# Altium PCB EUS1_Outline_5_trial07.PcbDoc (part 1 of 3)
Units mm, origin at the board's own origin, x right, y up, seen from the top; angles counter-clockwise.
Board outline 95.45 x 90.3 mm, 6 copper layers (Top Layer, Routing 1, GND, EPS_VCC, Routing 2, Bottom Layer), stack 2.257 mm thick; 247 components, 187 nets, 935 pads, 315 vias.
Unrouted connection lines stored in the file: 34.
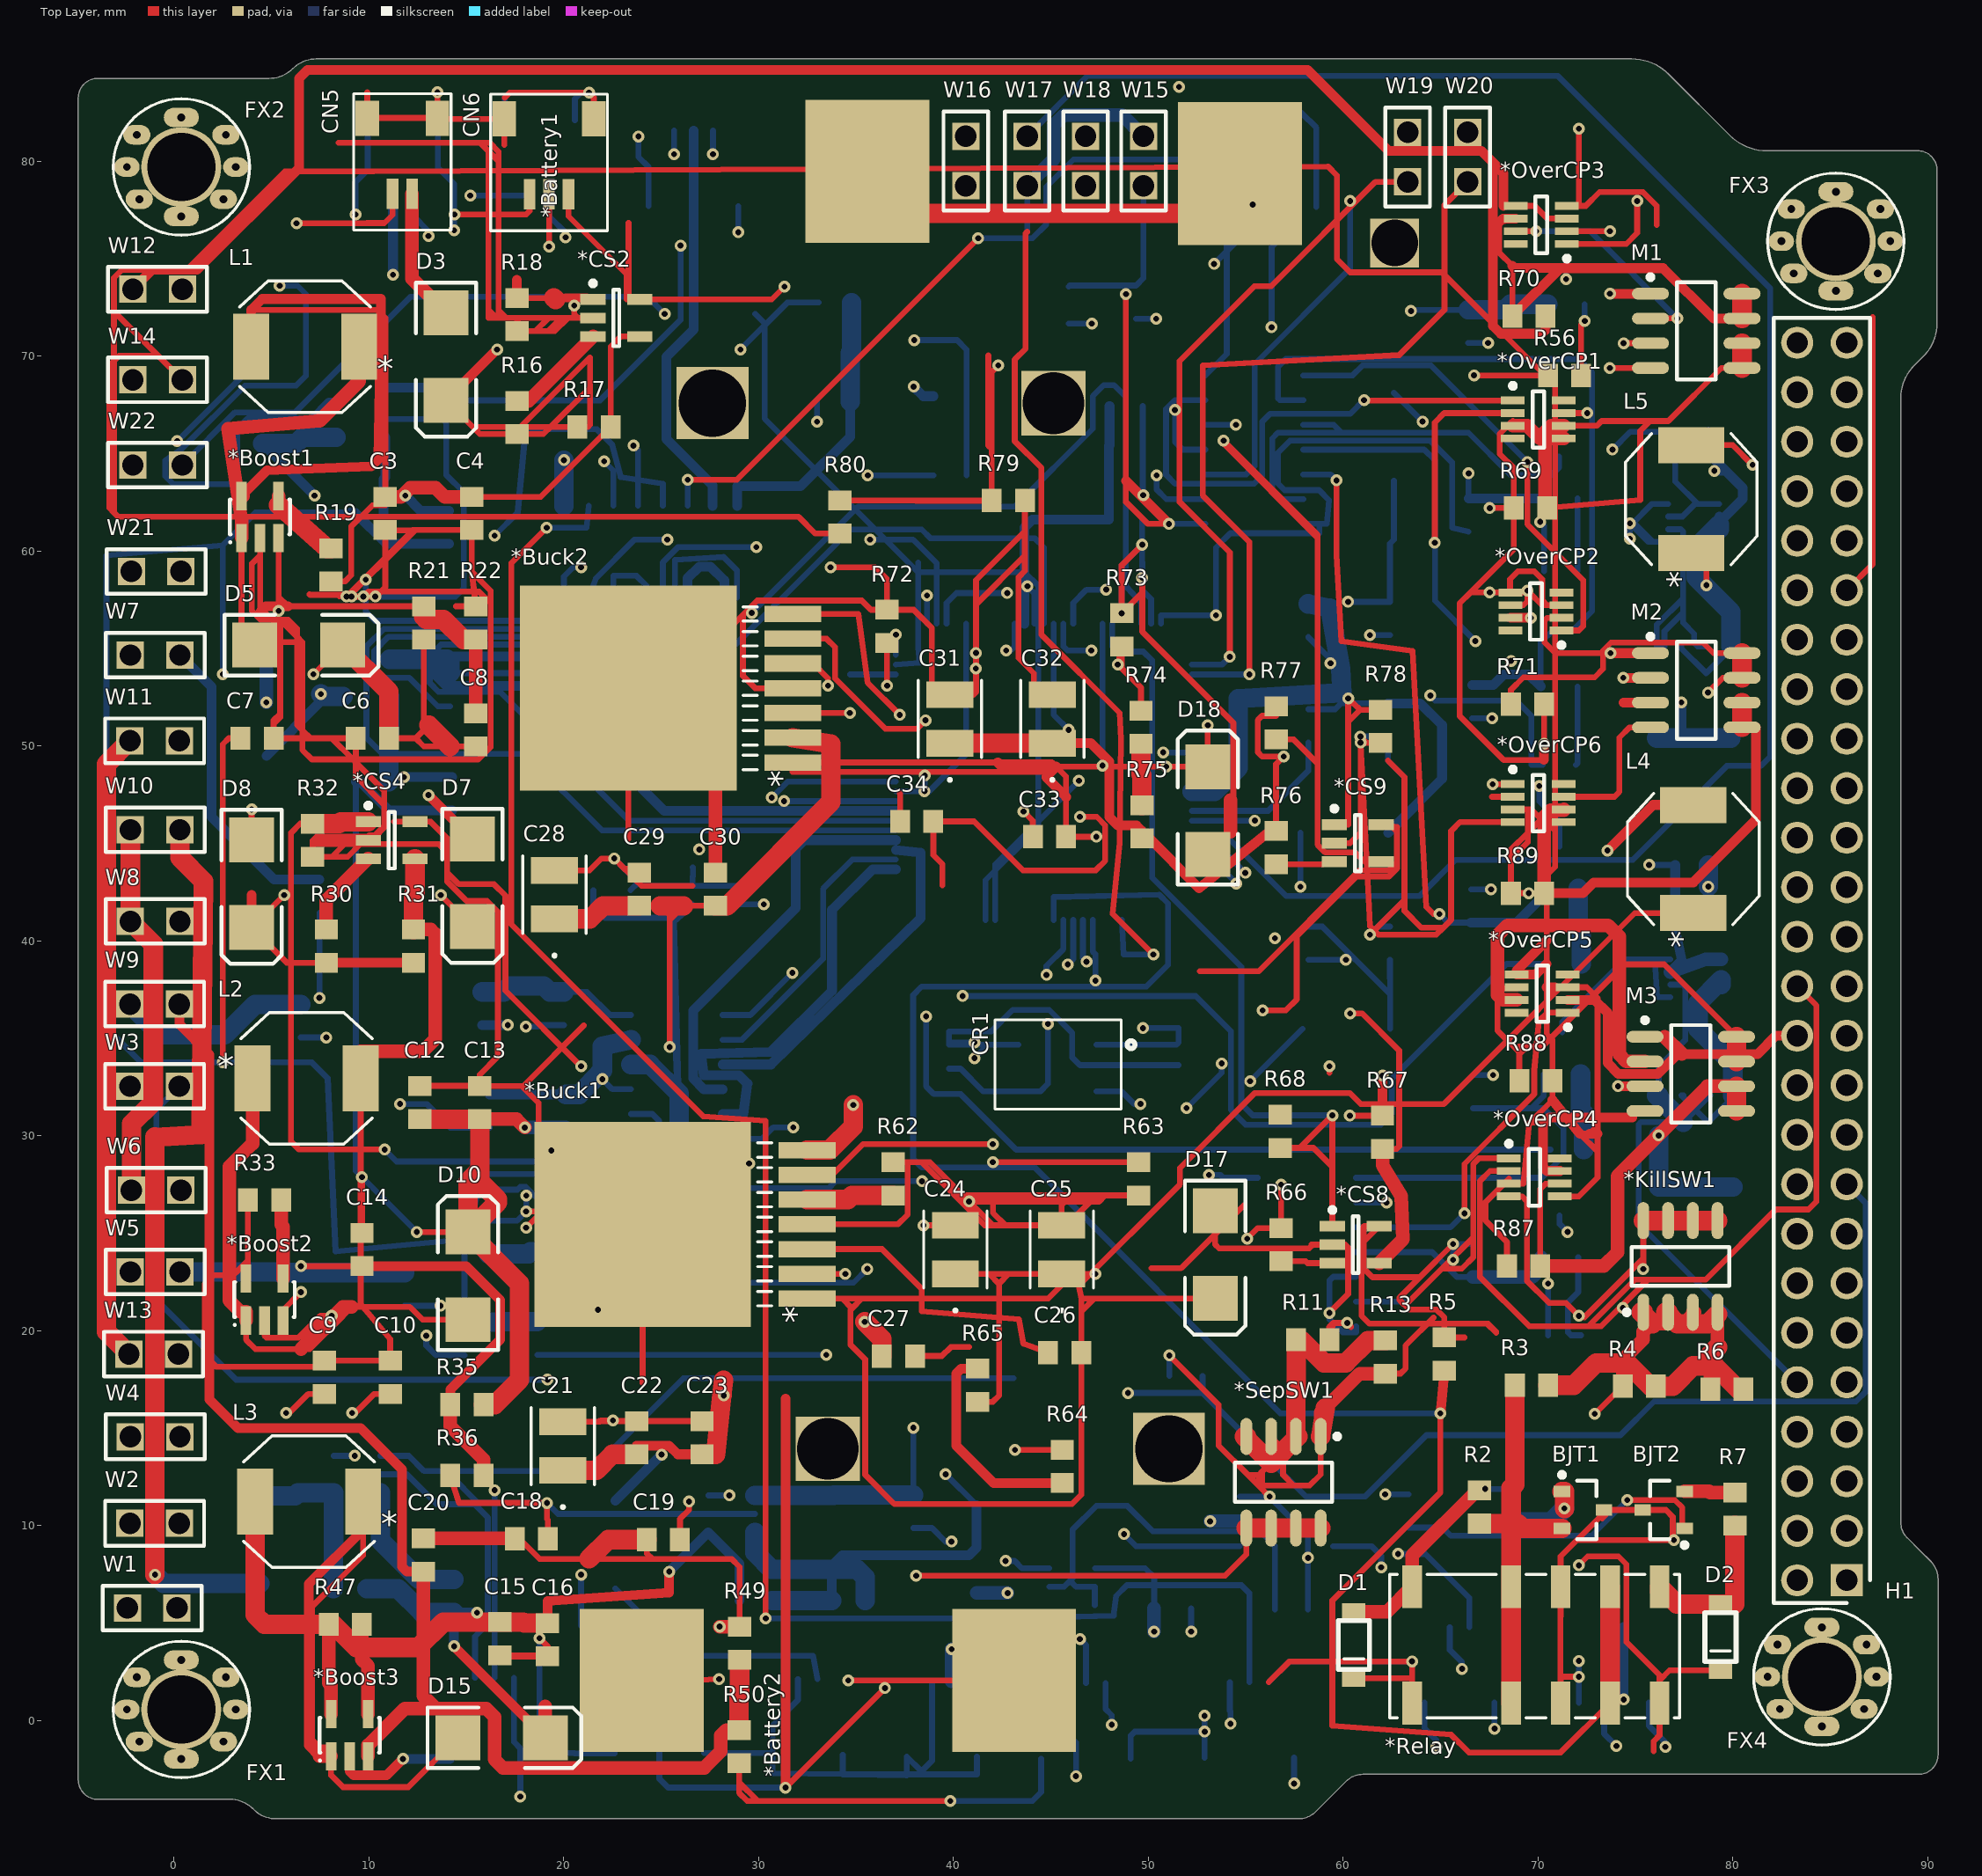
[diagram p0: Top Layer view]
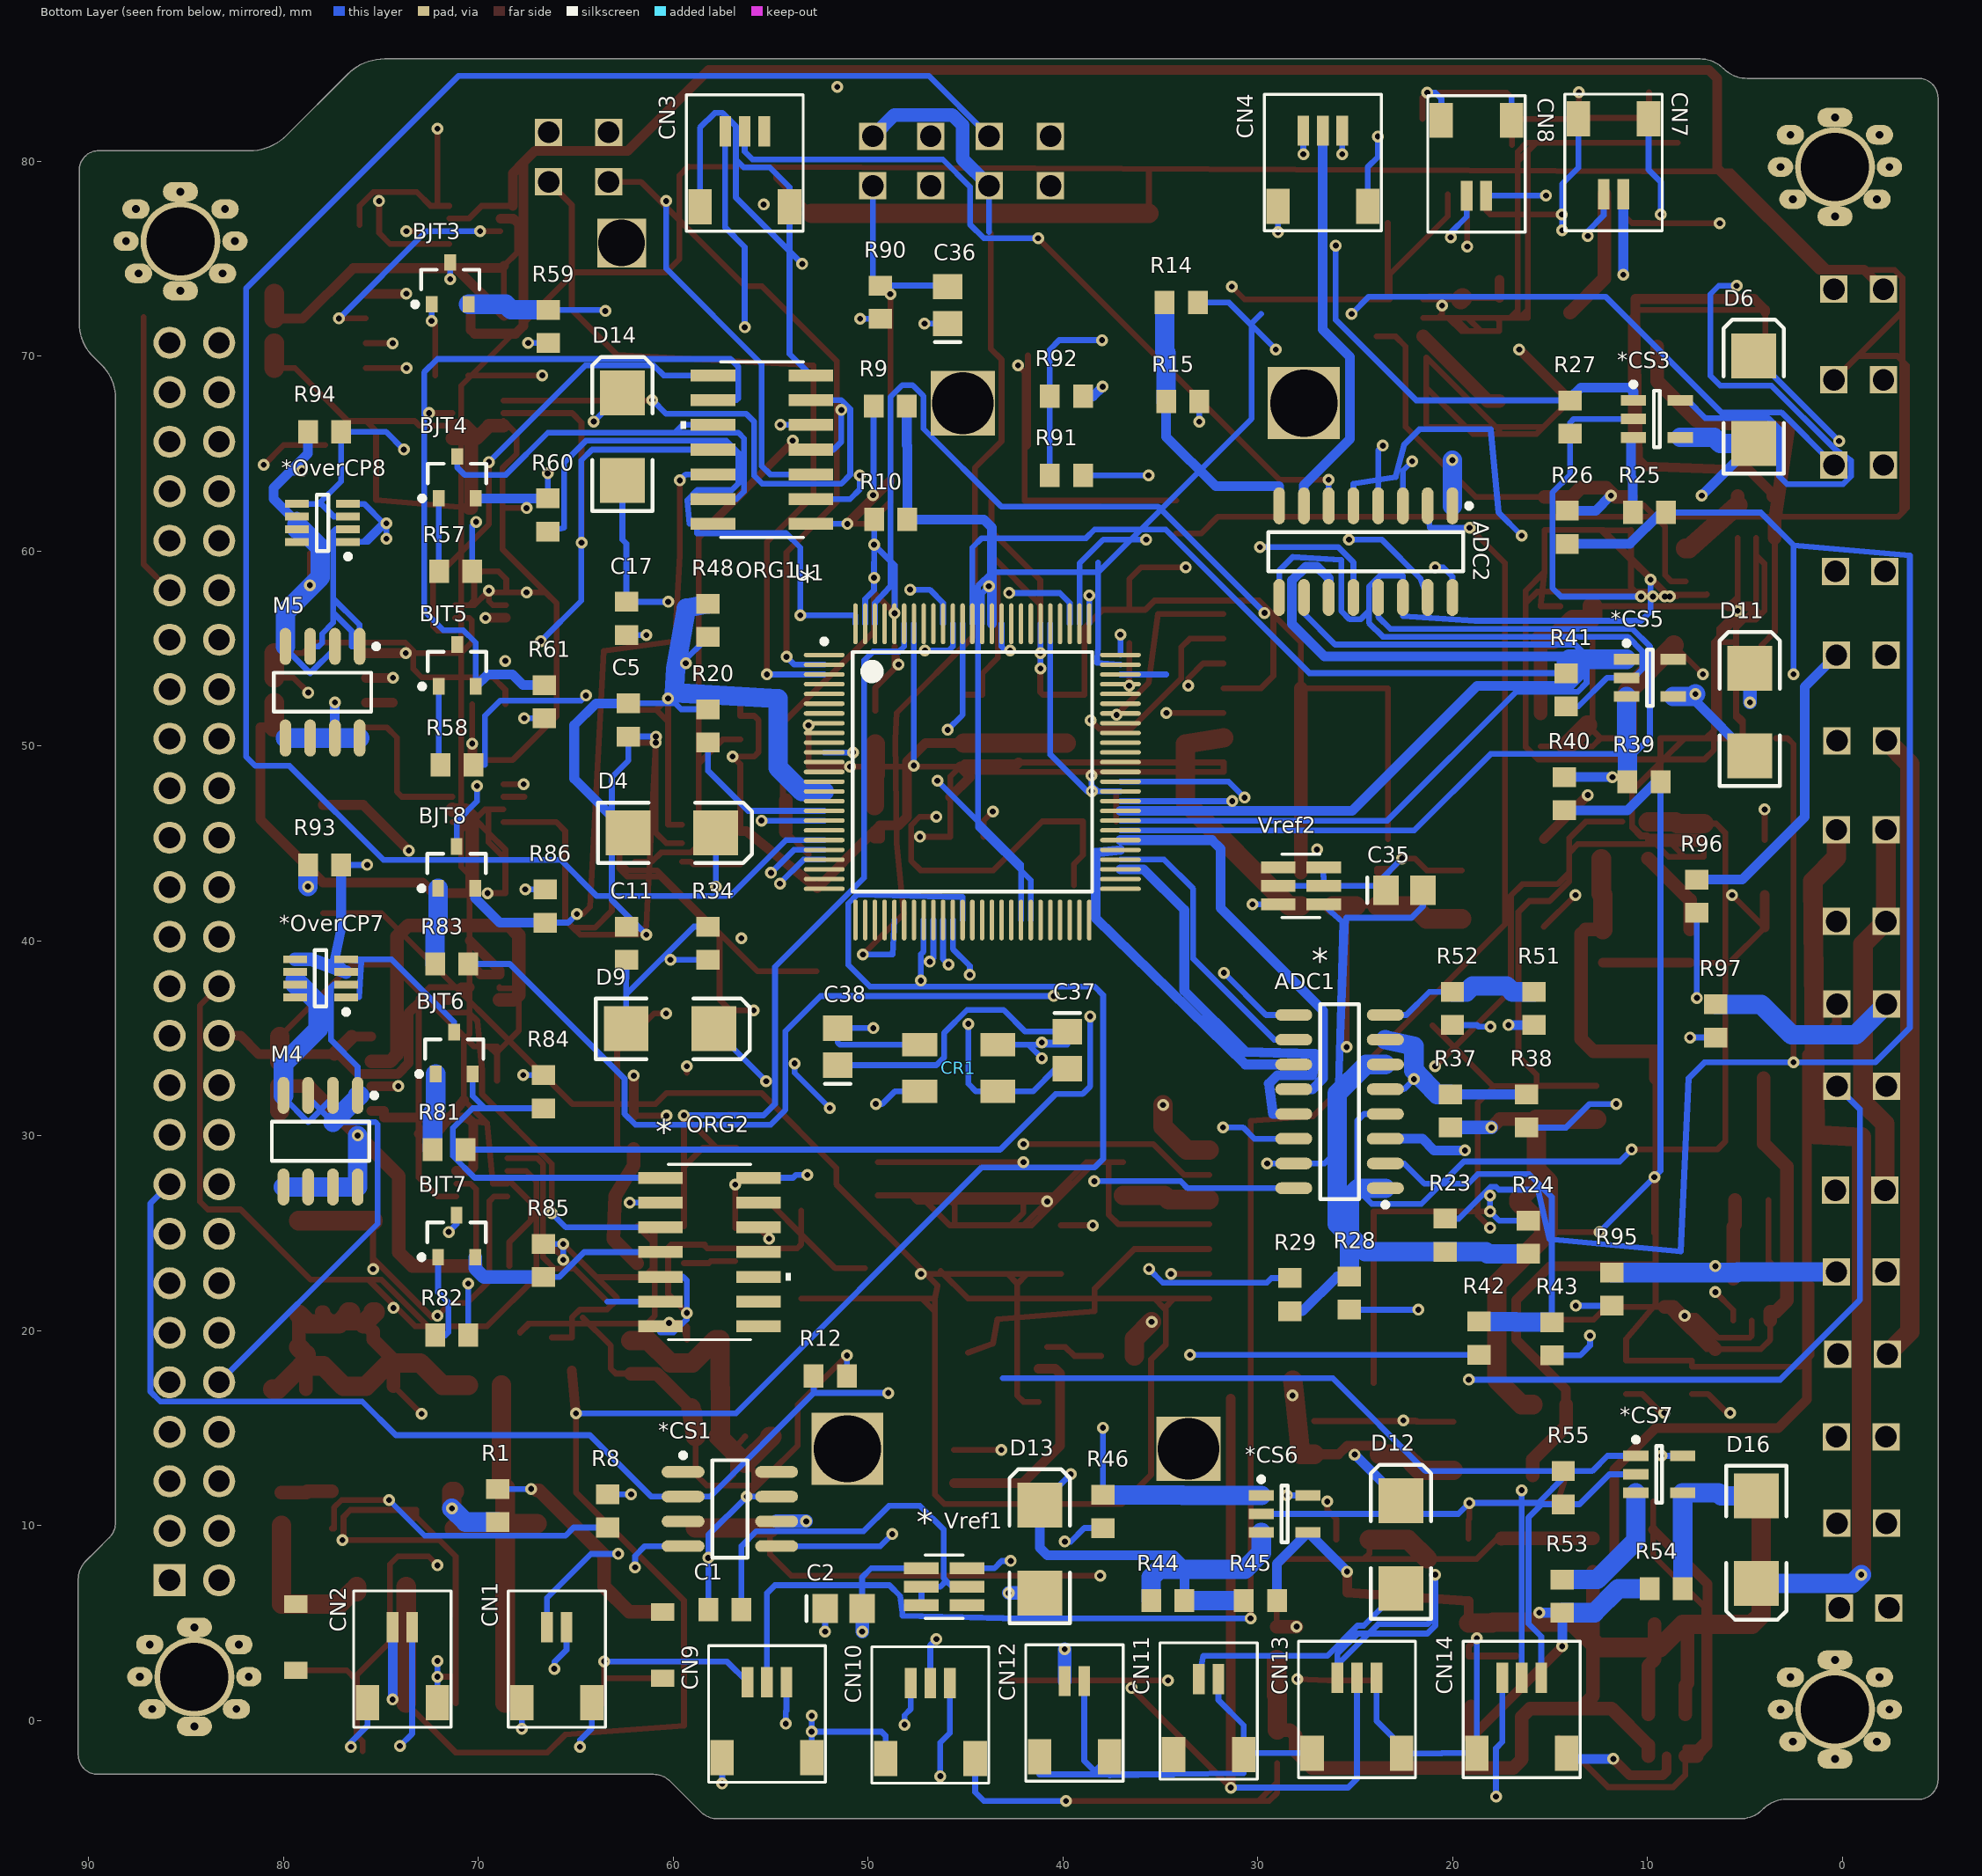
[diagram p1: Bottom Layer view, seen from below]
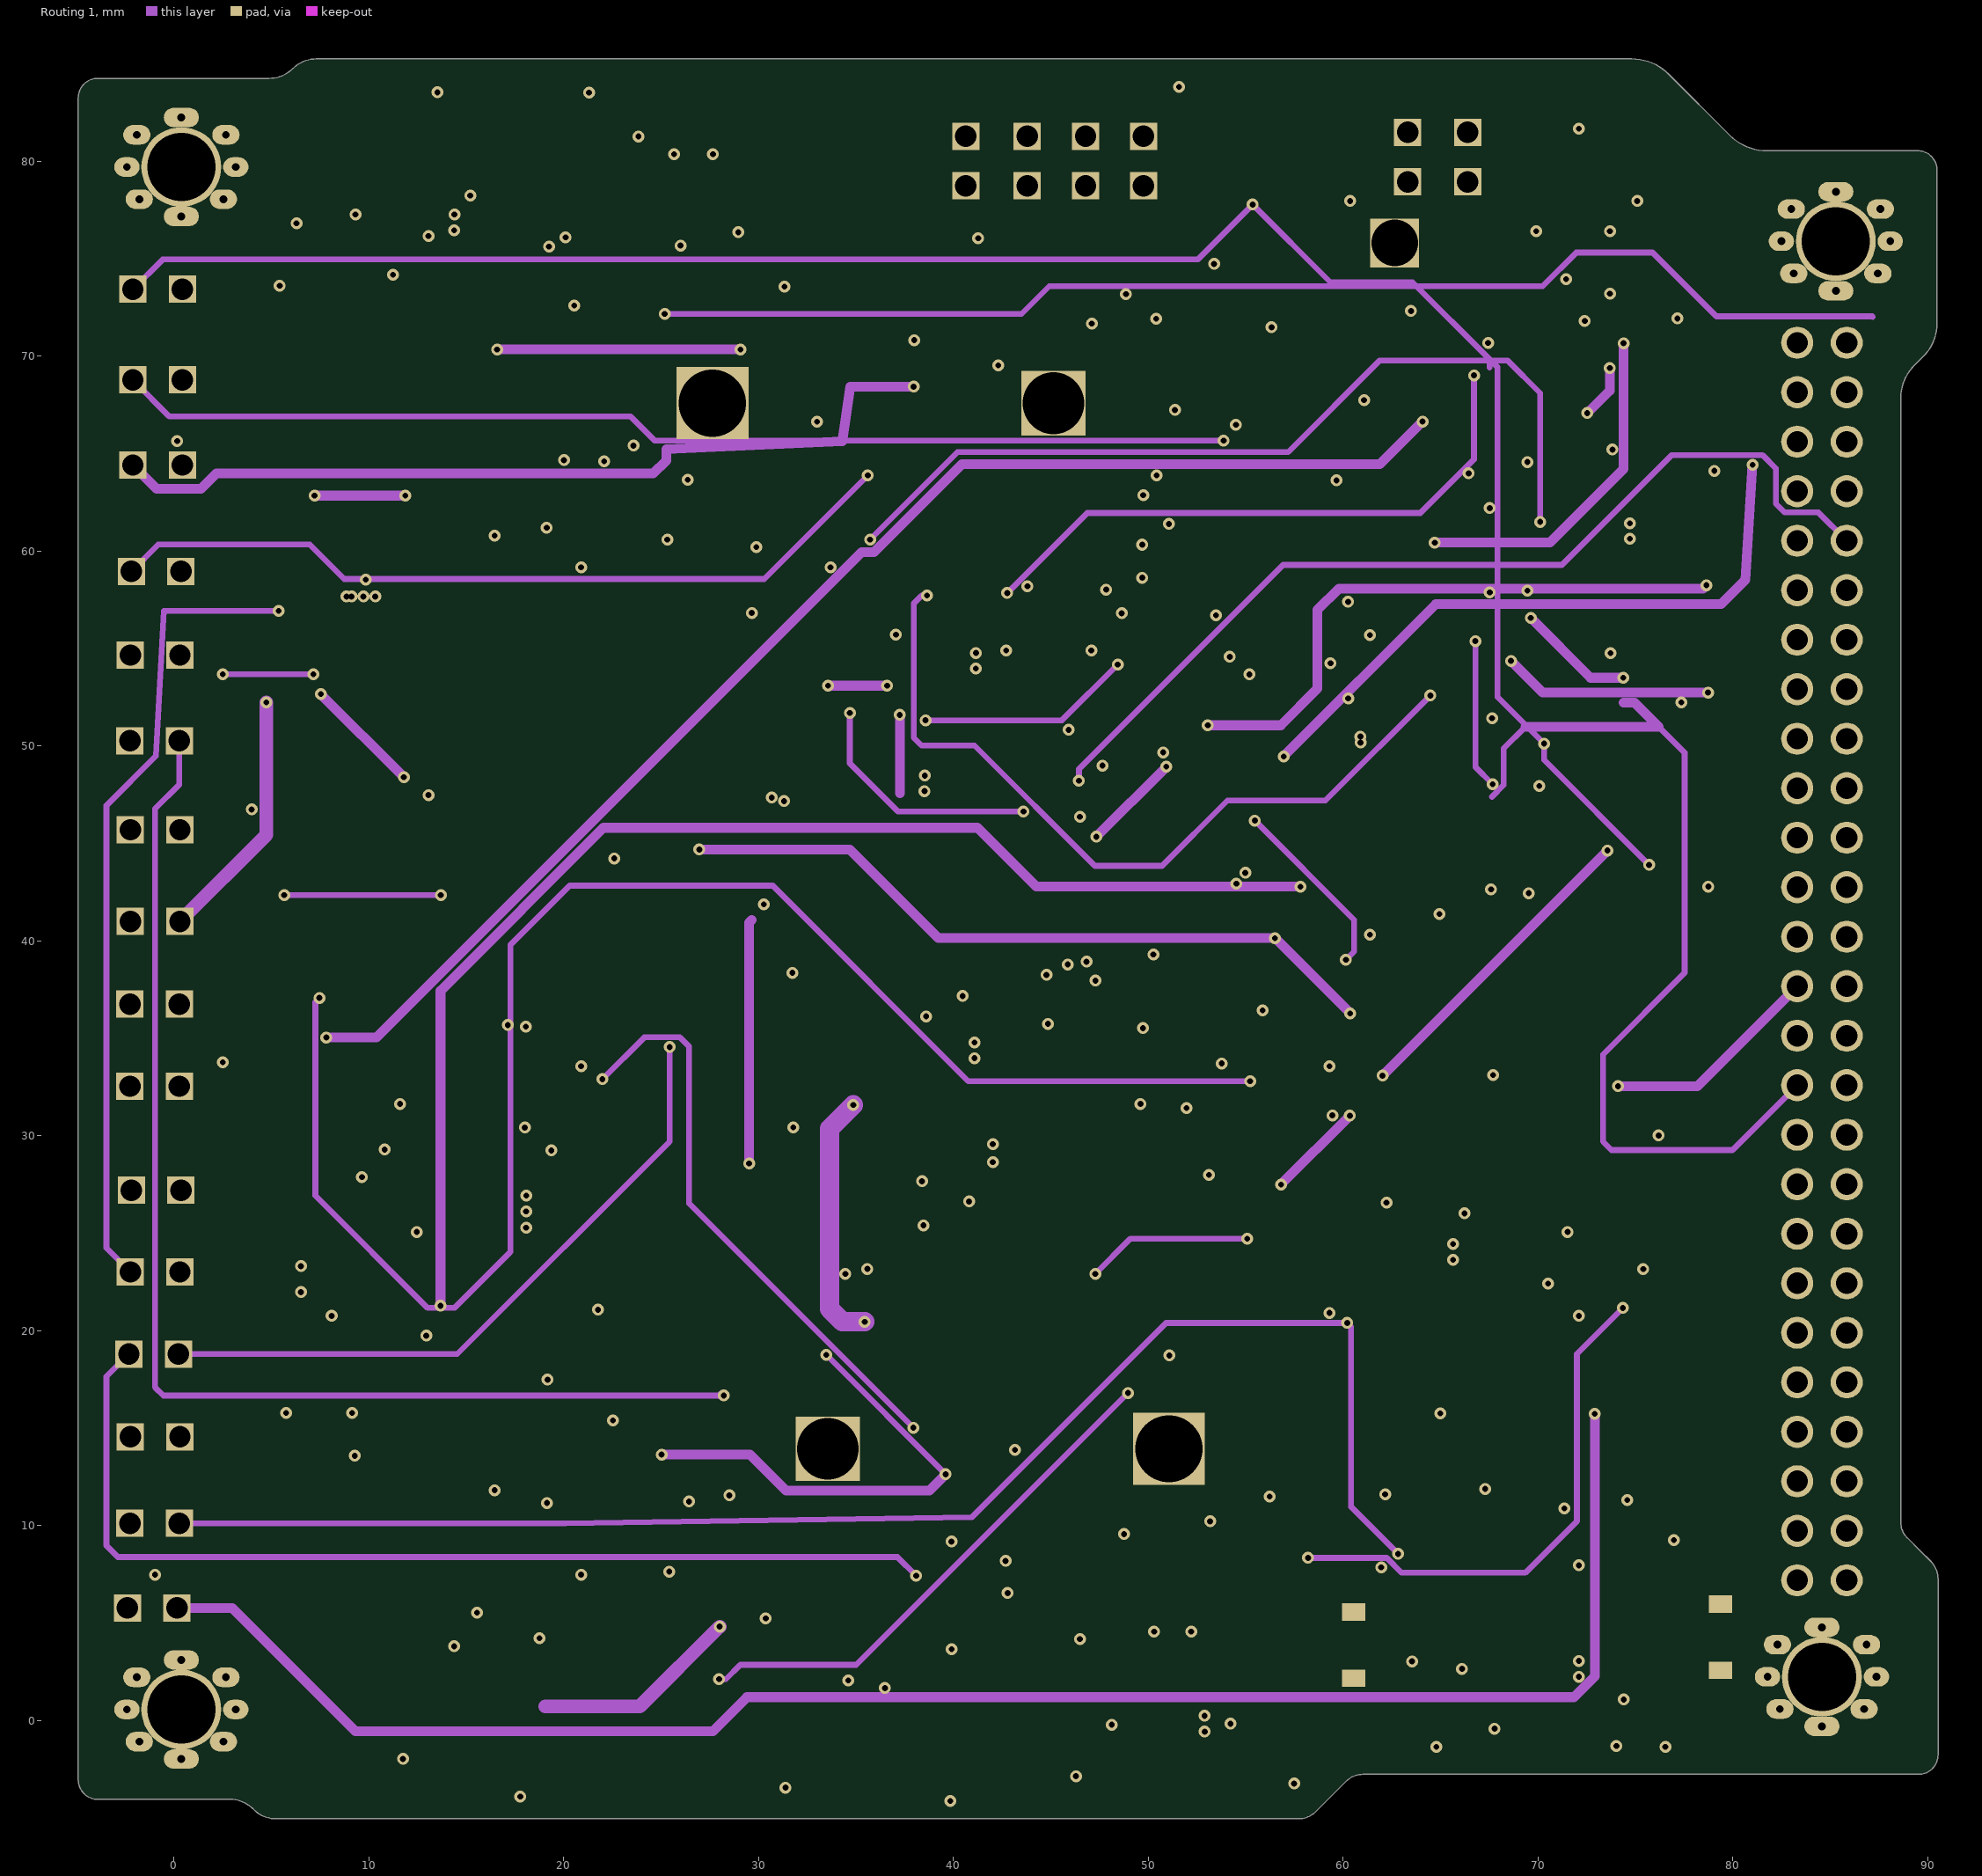
[diagram p2: Routing 1]
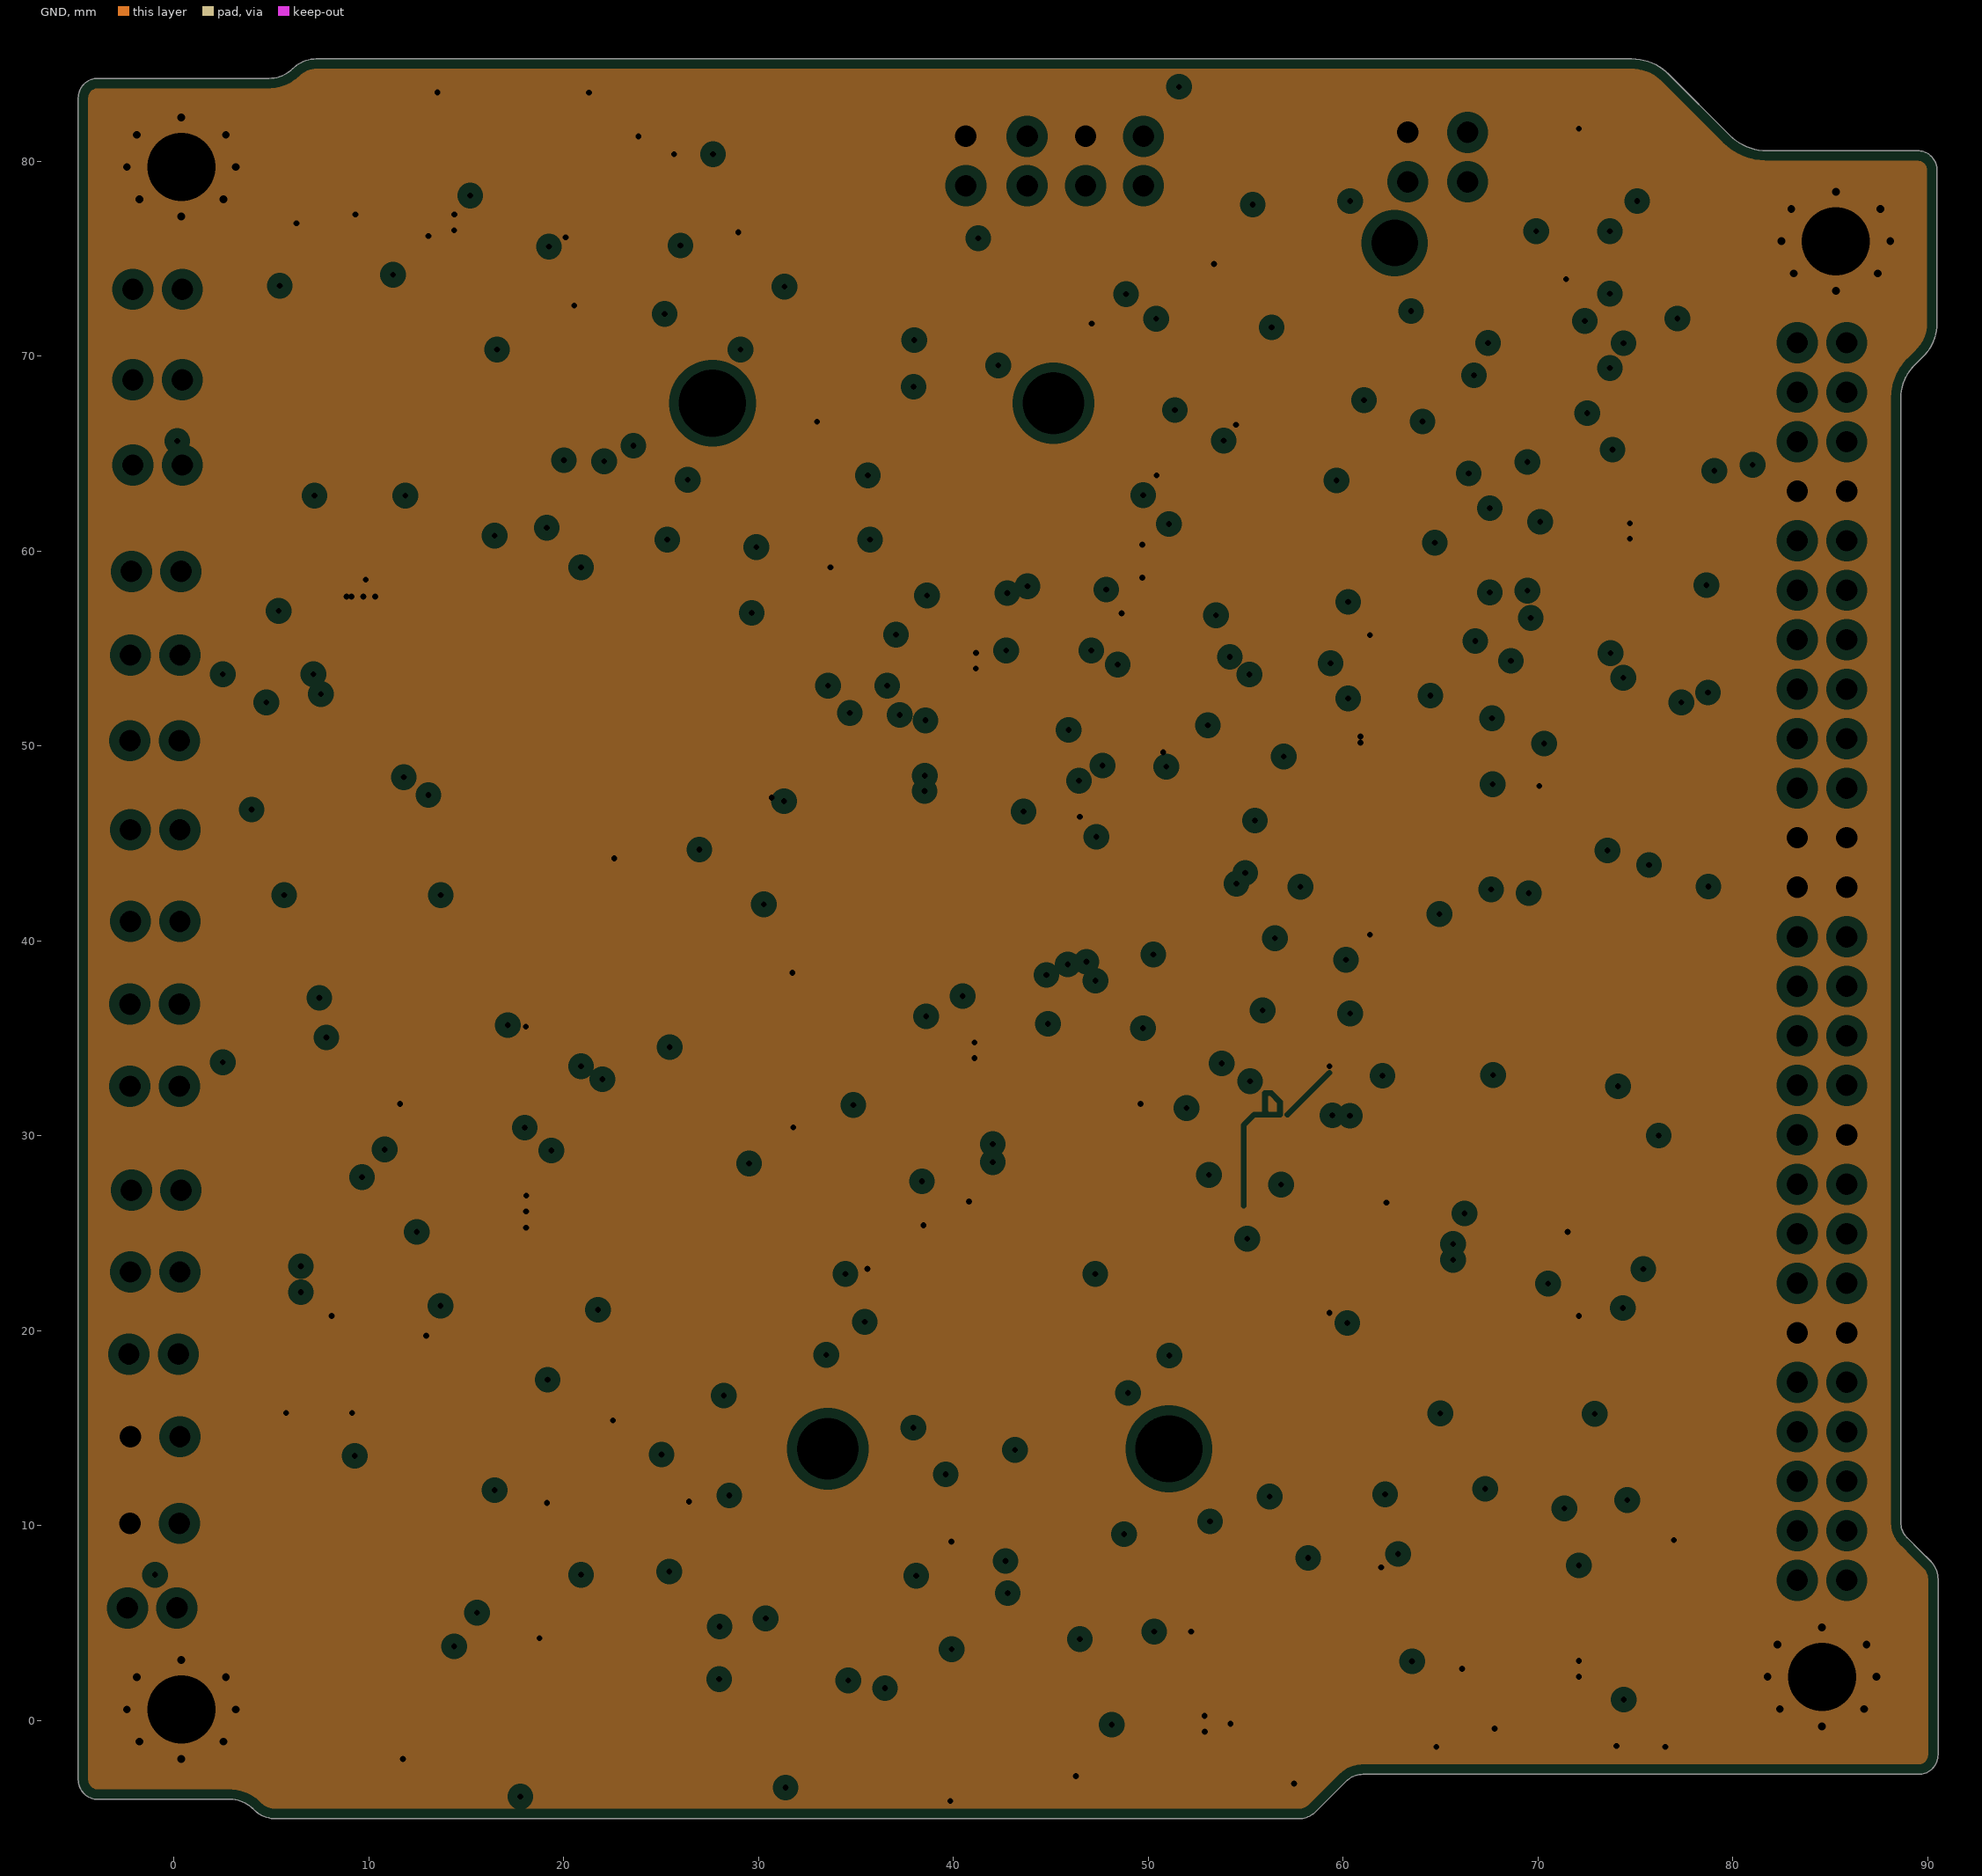
[diagram p3: GND, clearances drawn from the general rule]
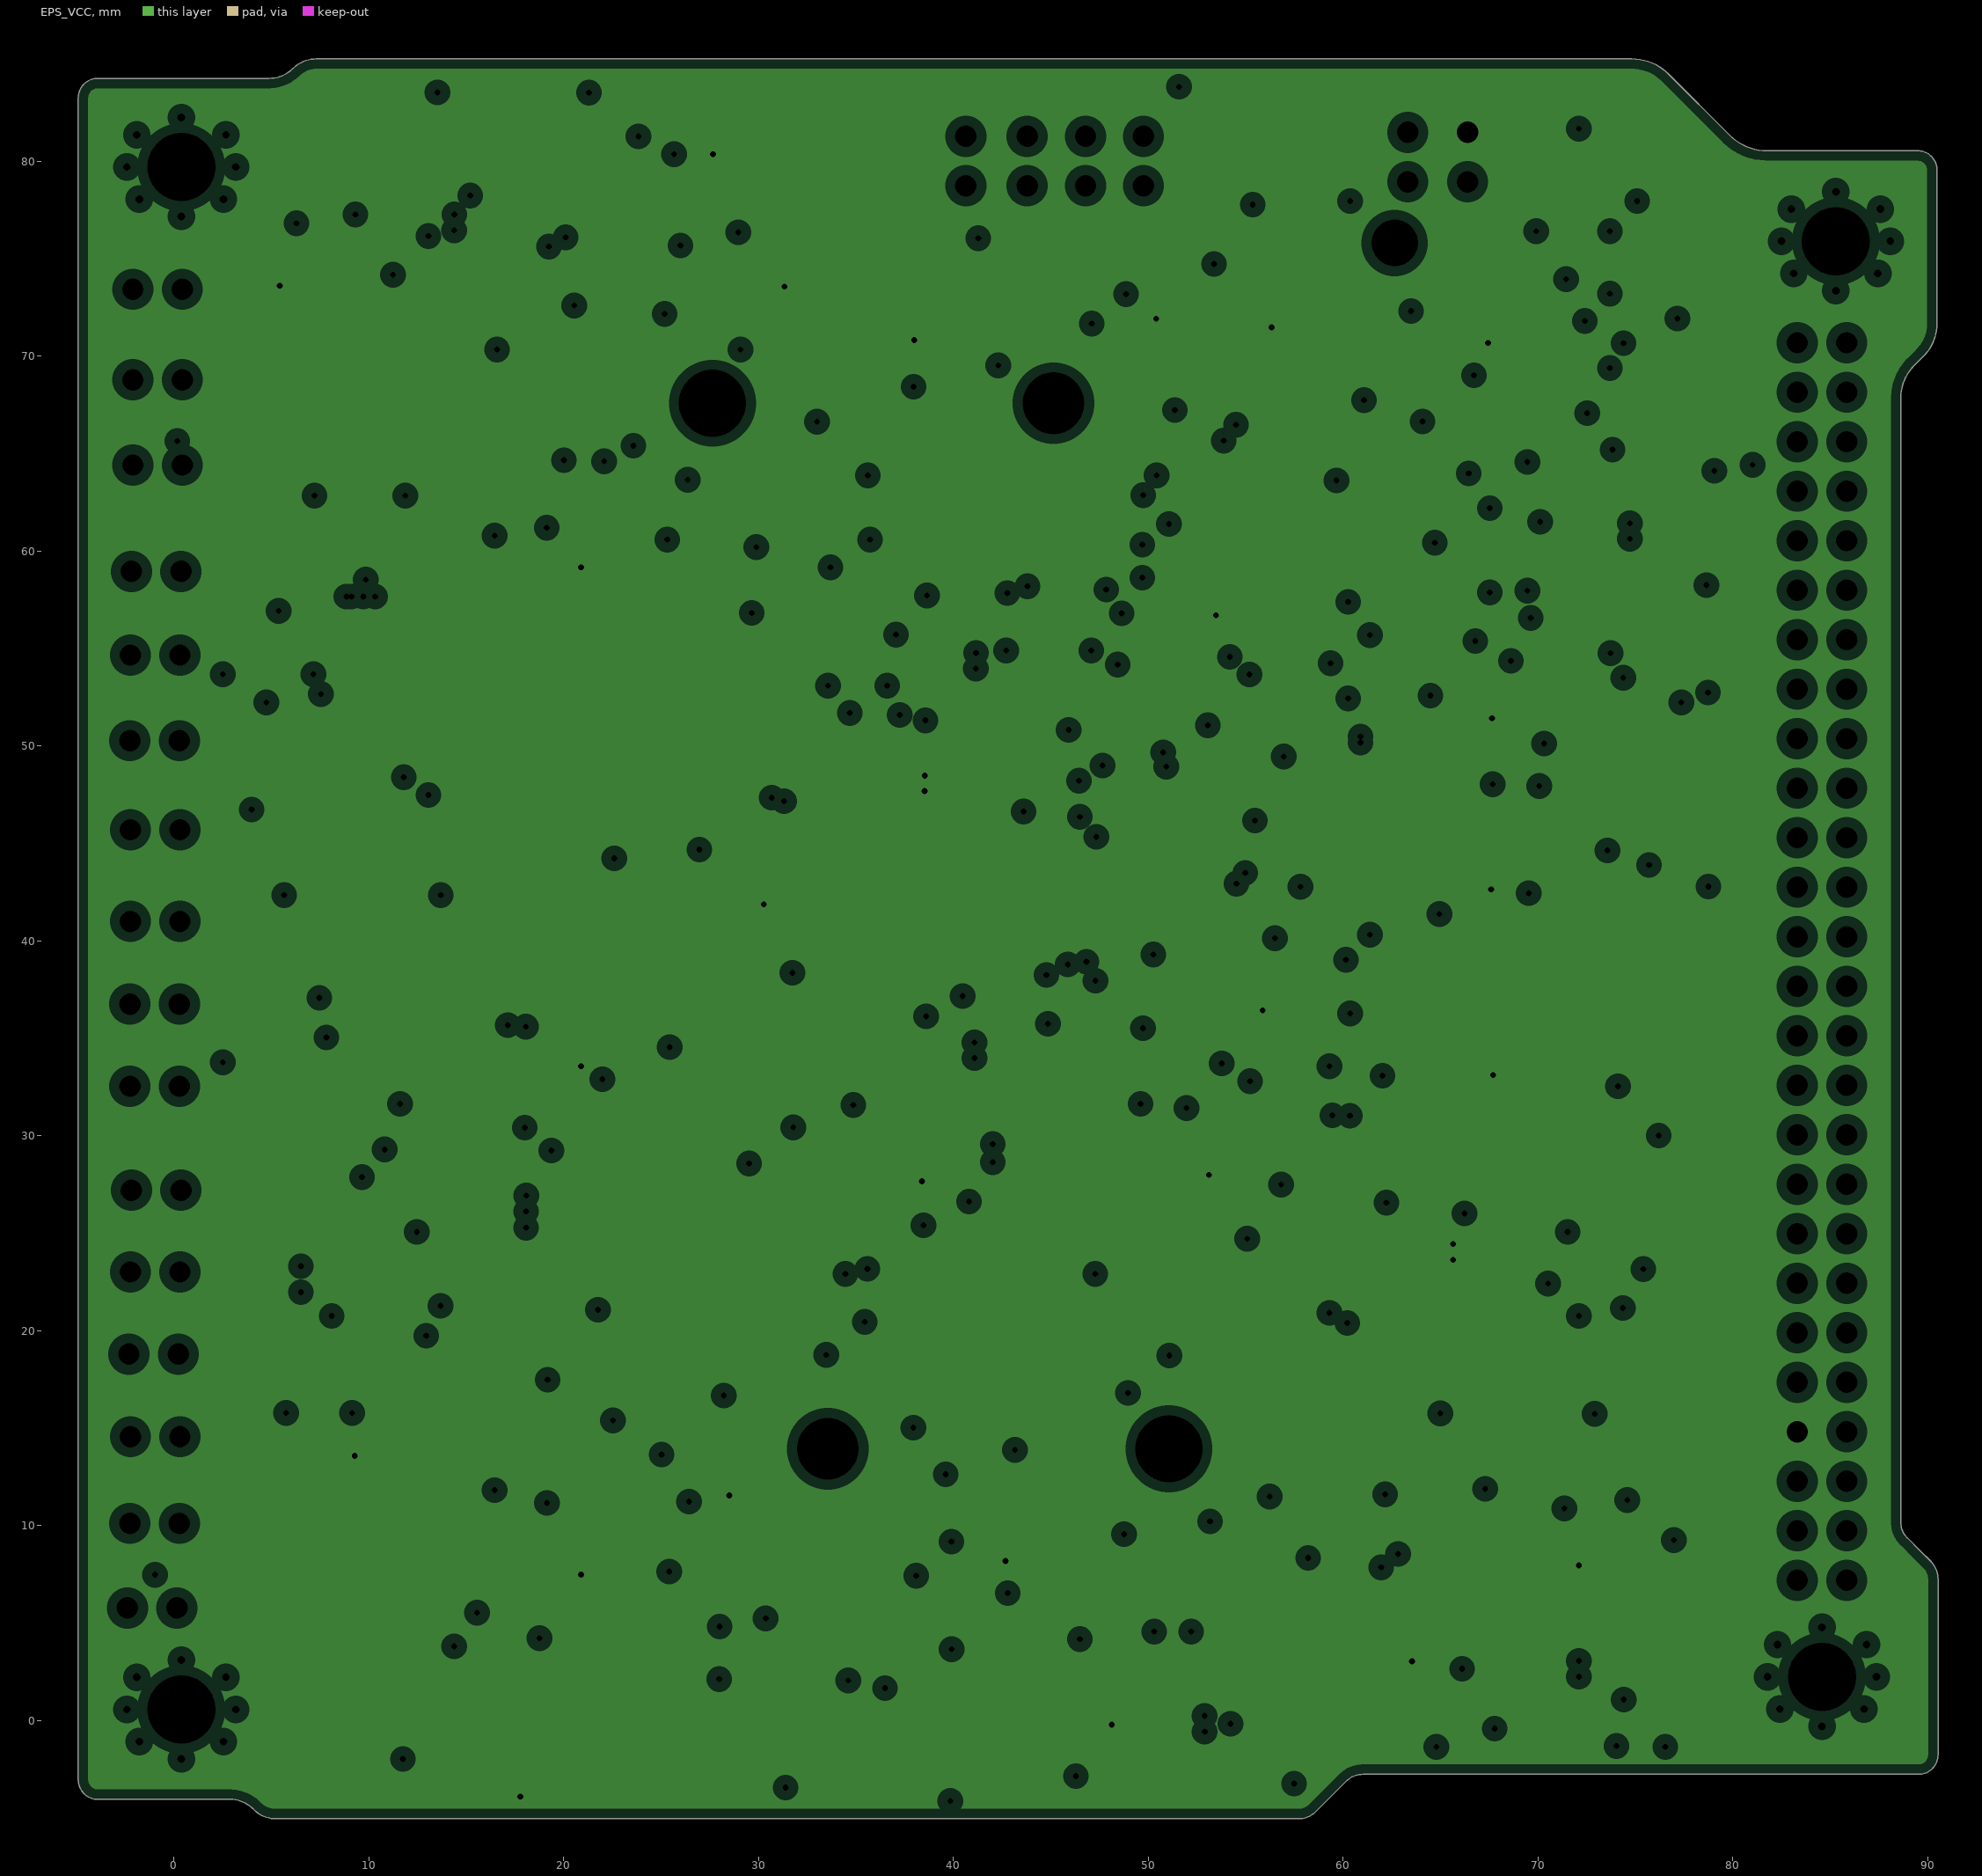
[diagram p4: EPS_VCC, clearances drawn from the general rule]
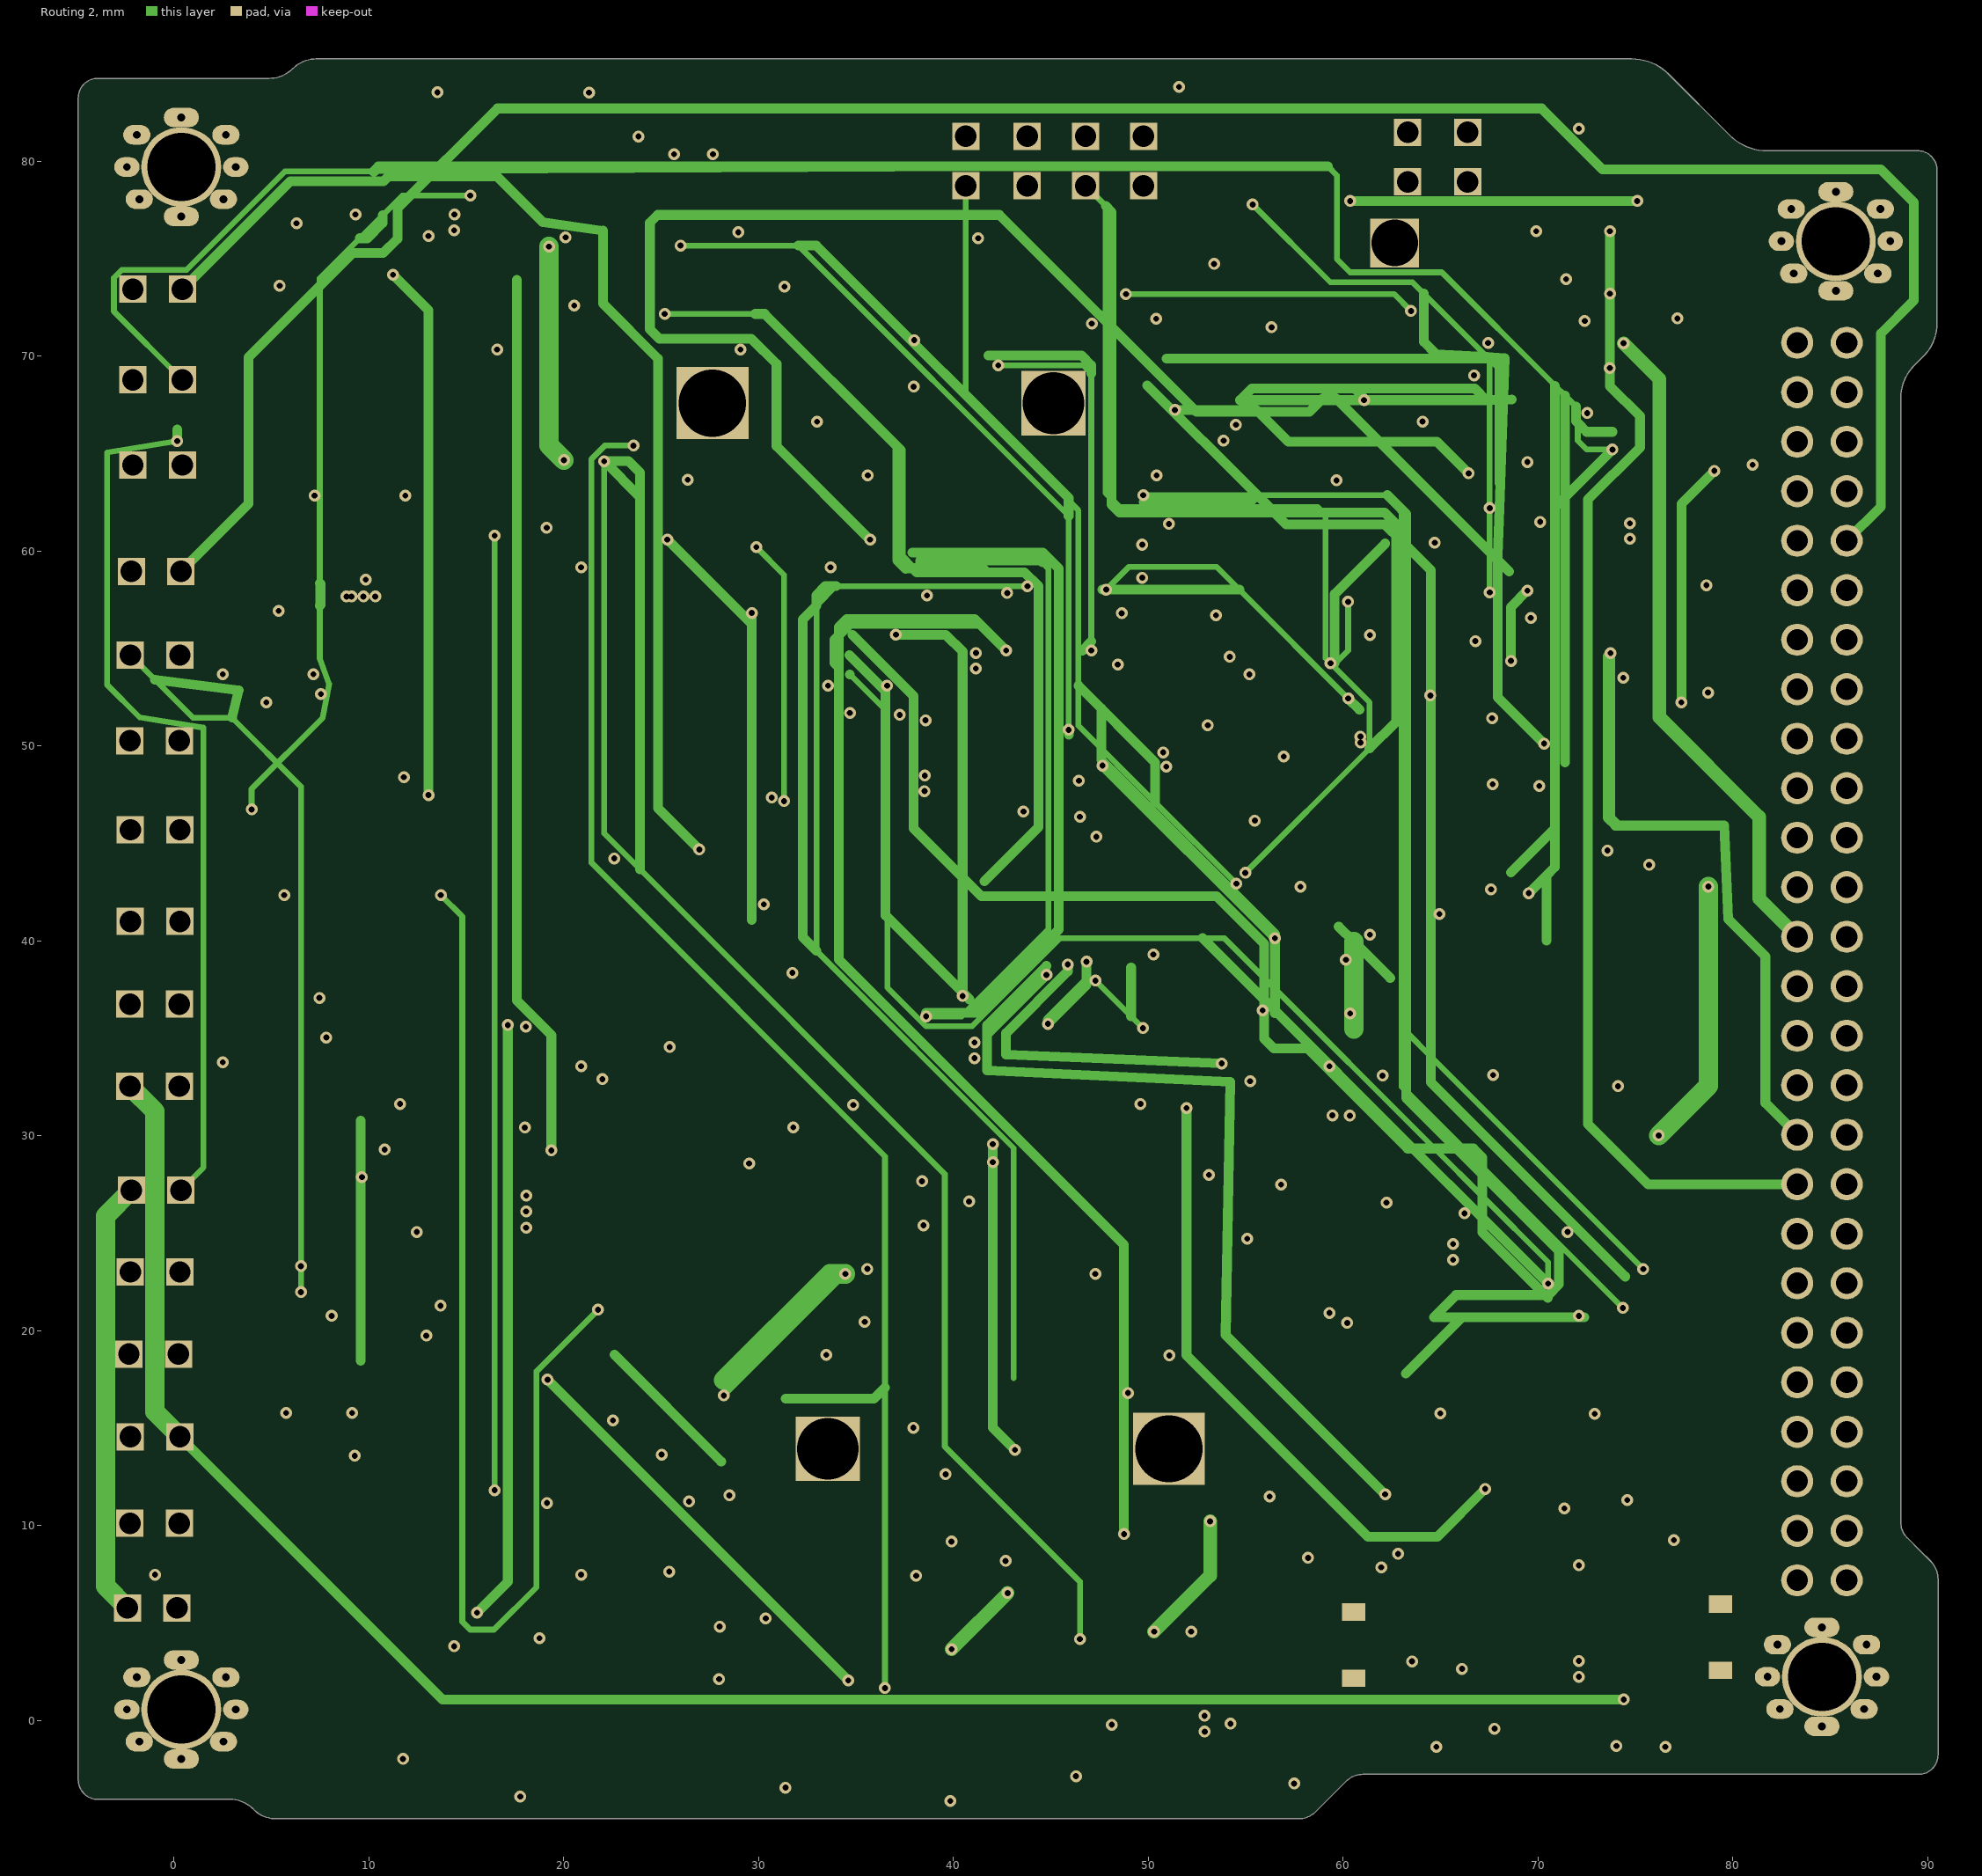
[diagram p5: Routing 2]

## Layer stack, top to bottom
Top Solder: solder mask 0.0102, Solder Resist, Dk 3.5
Top Layer: signal copper 0.0356
Dielectric 1: prepreg 0.1702, FR-4, Dk 4.35
Routing 1: signal copper 0.036
Dielectric 2: core 1.1938, FR-4, Dk 4.35
GND: plane copper 0.036, net GND
Dielectric 3: dielectric 0.254, Dk 4.2
EPS_VCC: plane copper 0.036, net EPS_5V_VCC
Dielectric 4: dielectric 0.254, Dk 4.2
Routing 2: signal copper 0.036
Dielectric 5: core 0.1702, FR-4, Dk 4.35
Bottom Layer: signal copper 0.0356
Bottom Solder: solder mask 0.0102, Solder Resist, Dk 3.5

## Board outline
2.9,-4.05 cw(c2.9,-5.668) 4.044,-4.524 4.096,-4.576 ccw(c5.24,-3.432) 5.24,-5.05 57.73,-5.05 ccw(c57.73,-3.831) 58.592,-4.693 60.158,-3.127 cw(c61.02,-3.989) 61.02,-2.77 89.54,-2.77 ccw(c89.54,-1.77) 90.54,-1.77 90.54,7.25 ccw(c89.248,7.25) 90.162,8.163 89.625,8.7 88.952,9.373 cw(c89.728,10.15) 88.63,10.15 88.63,67.85 cw(c90.996,67.85) 89.323,69.523 89.797,69.997 ccw(c88.124,71.67) 90.49,71.67 90.49,79.54 ccw(c89.49,79.54) 89.49,80.54 81.75,80.54 cw(c81.75,83.22) 79.855,81.325 76.715,84.465 ccw(c74.82,82.57) 74.82,85.25 7.302,85.25 ccw(c7.302,83.543) 6.095,84.75 cw(c4.888,85.957) 4.888,84.25 -3.91,84.25 ccw(c-3.91,83.25) -4.91,83.25 -4.91,-3.05 ccw(c-3.91,-3.05) -3.91,-4.05

## Design rules (kind name [scope] priority, off if disabled: settings)
Clearance Clearance_3 [OnLayer('Multi-Layer') vs OnLayer('Multi-Layer')] p1: gap=0.02
ComponentClearance [All] p1 off: gap=0.762 collisioncheckmode=3 verticalgap=0.762 showdistances=FALSE
ComponentClearance ComponentClearance_1 [All] p2 off: gap=0.5 collisioncheckmode=3 verticalgap=0.5 showdistances=FALSE
Height Height_1 [InComponent('CN1')] p2 off: minheight=0 maxheight=100 prefheight=12.7
MinimumSolderMaskSliver [All] p1: minsoldermaskwidth=0.102
PlaneClearance [All] p1: clearance=0.508
PlaneConnect [All] p1: planeconnectstyle=Relief reliefexpansion=0.508 reliefentries=4 reliefconductorwidth=0.254 reliefairgap=0.254
PolygonConnect [All] p1: connectstyle=Relief reliefconductorwidth=0.254 reliefentries=4 polygonreliefangle="90 Angle" airgapwidth=0.254
RoutingVias [All] p1: holewidth=0.305 width=0.61 viastyle="Through Hole" minholewidth=0.254 minwidth=0.254 maxholewidth=0.305 maxwidth=0.61
SilkToSilkClearance [All] p1: silktosilkclearance=0.102
SolderMaskExpansion [All] p1: expansion=0.076
Width [All] p1: maxlimit=1.7 minlimit=0.2 preferedwidth=0.3 minimp=50.000000 maximp=50.000000 favimp=50.000000
25 further rules are at their usual default settings.

## Classes and differential pairs
component class Z_line_07: *Boost3 *CS6 *CS7 C15 C16 C17 C18 C19 C20 CN11 CN12 CN13 CN14 D12 D13 D14 D15 D16 L3 R42 R43 R44 R45 R46 R47 R48 R49 R50 R51 R52 R53 R54 R55 R97 W9 W10
component class Y_line_07: *Boost2 *CS4 *CS5 C9 C10 C11 C12 C13 C14 CN7 CN8 CN9 CN10 D7 D8 D9 D10 D11 L2 R28 R29 R30 R31 R32 R33 R34 R35 R36 R37 R38 R39 R40 R41 R96 W7 W8
component class X_line_07: *Boost1 *CS2 *CS3 C3 C4 C5 C6 C7 C8 CN5 CN6 D3 D4 D5 D6 L1 R14 R15 R16 R17 R18 R19 R20 R21 R22 R23 R24 R25 R26 R27 R95 W5 W6
component class Microcontroller_07: C36 C37 C38 CR1 R90 R91 R92 U1 W15 W16 W17 W18 W19 W20 W21 W22
component class Buck_5V_line_07: *Buck2 *CS9 *OverCP4 *OverCP5 *OverCP6 *OverCP8 BJT6 BJT7 BJT8 C28 C29 C30 C31 C32 C33 C34 D18 L5 M3 M5 ORG2 R72 R73 R74 R75 R76 R77 R78 R79 R80 R81 R82 R83 R84 R85 R86 R87 R88 R89 R94 W13 W14
component class Fixture_07: FX1 FX2 FX3 FX4 H1
component class Buck_3.3V_line_07: *Buck1 *CS8 *OverCP1 *OverCP2 *OverCP3 *OverCP7 BJT3 BJT4 BJT5 C21 C22 C23 C24 C25 C26 C27 D17 L4 M1 M2 M4 ORG1 R56 R57 R58 R59 R60 R61 R62 R63 R64 R65 R66 R67 R68 R69 R70 R71 R93 W11 W12
component class Battery_07: *Battery1 *Battery2 *CS1 *KillSW1 *Relay *SepSW1 BJT1 BJT2 C1 C2 CN1 CN2 CN3 CN4 D1 D2 R1 R2 R3 R4 R5 R6 R7 R8 R9 R10 R11 R12 R13 Vref1 W1 W2 W3 W4
component class ADC_REF_07: ADC1 ADC2 C35 Vref2

## Components (designator, comment, footprint, x,y, rotation, side; value= is the part's Value field where it differs from the comment)
*Battery1 "Battery1" Battery1 55.067,-1.626 r90 top
*Battery2 "Battery2" BATTERY2 66.65,-3.175 r90 top
*Boost1 "LMR6242" DBV005 4.42,61.747 r0 top
*Boost2 "Boost2" DBV005 4.648,21.59 r0 top
*Boost3 "Boost3" DBV005 9.017,-0.762 r0 top
*Buck1 "LM22679" TJ7A-M 24.105,25.451 r90 top
*Buck2 "LM22679" TJ7A-M 23.368,52.959 r90 top
*CS1 "LT1787HVCS8#TRPBF" LT-S8-8_N 57.099,10.846 r180 bottom
*CS2 "CS2" LT-S5-5-TSOT-23_N 22.708,71.958 r0 top
*CS3 "CS3" LT-S5-5-TSOT-23_N 9.525,66.777 r180 bottom
*CS4 "CS4" LT-S5-5-TSOT-23_N 11.176,45.161 r0 top
*CS5 "CS5" LT-S5-5-TSOT-23_N 9.881,53.492 r180 bottom
*CS6 "CS6" LT-S5-5-TSOT-23_N 28.626,10.592 r180 bottom
*CS7 "CS7" LT-S5-5-TSOT-23_N 9.398,12.624 r180 bottom
*CS8 "LT6106HS5#TRMPBF" LT-S5-5-TSOT-23_N 60.655,24.409 r0 top
*CS9 "LT6106HS5#TRMPBF" LT-S5-5-TSOT-23_N 60.757,45.009 r0 top
*KillSW1 "IRF7329TRPBF" SO8_L 77.318,23.292 r90 top
*OverCP1 "LTC4361ITS8-1#TRMPBF" LT-TS8-8-TSOT-23_V 70.028,66.751 r0 top
*OverCP2 "LTC4361ITS8-1#TRMPBF" LT-TS8-8-TSOT-23_V 69.901,56.896 r180 top
*OverCP3 "LTC4361ITS8-1#TRMPBF" LT-TS8-8-TSOT-23_V 70.18,76.733 r180 top
*OverCP4 "LTC4361ITS8-1#TRMPBF" LT-TS8-8-TSOT-23_V 69.825,27.864 r0 top
*OverCP5 "LTC4361ITS8-1#TRMPBF" LT-TS8-8-TSOT-23_V 70.231,37.287 r180 top
*OverCP6 "LTC4361ITS8-1#TRMPBF" LT-TS8-8-TSOT-23_V 70.028,47.066 r0 top
*OverCP7 "LTC4361ITS8-2#TRMPBF" LT-TS8-8-TSOT-23_V 78.105,38.075 r0 bottom
*OverCP8 "LTC4361ITS8-2#TRMPBF" LT-TS8-8-TSOT-23_V 78.003,61.443 r0 bottom
*Relay "G6SK-2G DC3" "G6SK-2G DC3" 63.043,-0.254 r0 top
*SepSW1 "IRF7329TRPBF" SO8_L 56.947,12.217 r270 top
ADC1 "MCP3008T-I/SL" SOIC16_L 25.806,31.75 r0 bottom
ADC2 "MCP3008T-I/SL" SOIC16_L 24.46,59.969 r270 bottom
BJT1 "MMBT2222A" SOT-23A_L 72.314,10.795 r0 top
BJT2 "MMBT2222A" SOT-23A_L 76.454,10.795 r180 top
BJT3 "MMBT2222A" SOT-23A_L 71.45,73.736 r90 bottom
BJT4 "MMBT2222A" SOT-23A_L 71.095,63.779 r90 bottom
BJT5 "MMBT2222A" SOT-23A_L 71.095,54.127 r90 bottom
BJT6 "MMBT2222A" SOT-23A_L 71.247,34.239 r90 bottom
BJT7 "MMBT2222A" SOT-23A_L 71.12,24.841 r90 bottom
BJT8 "MMBT2222A" SOT-23A_L 71.12,43.764 r90 bottom
C1 "GRM188R71H472KA0" RC0805N 57.353,5.69 r0 bottom
C2 "1uF" 0805 51.257,5.74 r180 bottom
C3 "GRM155R71H103KA8" RC0805N 10.846,61.925 r90 top
C4 "22uF" RC0805N 15.291,61.925 r90 top
C5 "220nF" RC0805N 62.306,51.333 r90 bottom
C6 "10uF" RC0805N 10.185,50.394 r0 top
C7 "GRM155R71H103KA8" RC0805N 4.267,50.394 r180 top
C8 "330pF" RC0805N 15.494,50.825 r270 top
C9 "GRM155R71H103KA8" RC0805N 7.722,17.602 r90 top
C10 "22uF" RC0805N 11.1,17.602 r90 top
C11 "220nF" RC0805N 62.408,39.878 r270 bottom
C12 "10uF" RC0805N 12.624,31.699 r270 top
C13 "GRM155R71H103KA8" RC0805N 15.697,31.699 r270 top
C14 "330nF" RC0805N 9.652,24.155 r90 top
C15 "GRM155R71H103KA8" RC0805N 16.739,4.191 r90 top
C16 "22uF" RC0805N 19.177,4.14 r90 top
C17 "100uF" RC0805N 62.408,56.54 r90 bottom
C18 "10uF" RC0805N 18.339,9.322 r180 top
C19 "GRM155R71H103KA8" RC0805N 25.121,9.271 r180 top
C20 "330nF" RC0805N 12.802,8.484 r90 top
C21 "22uF" TAJB 19.964,14.072 r90 top
C22 "10uF" RC0805N 23.749,14.503 r270 top
C23 "10uF" RC0805N 27.102,14.503 r270 top
C24 "100uF" TAJB 40.107,24.155 r90 top
C25 "100uF" TAJB 45.568,24.155 r90 top
C26 "10nF" RC0805N 45.72,18.872 r0 top
C27 "1uF" RC0805N 37.186,18.694 r180 top
C28 "22uF" TAJB 19.533,42.367 r90 top
C29 "10uF" RC0805N 23.876,42.647 r270 top
C30 "10uF" RC0805N 27.788,42.647 r270 top
C31 "100uF" TAJB 39.827,51.384 r90 top
C32 "100uF" TAJB 45.085,51.384 r90 top
C33 "10nF" RC0805N 44.933,45.339 r0 top
C34 "1uF" RC0805N 38.125,46.126 r180 top
C35 "1uF" 0805 22.479,42.596 r180 bottom
C36 "1uF" 0805 45.923,72.619 r90 bottom
C37 "22uF" 0805 39.776,34.392 r270 bottom
C38 "22uF" 0805 51.562,34.569 r90 bottom
CN1 "SM02B-SRSS" 2pins 68.478,-0.356 r180 bottom
CN2 "SM02B-SRSS" 2pins 76.403,-0.356 r180 bottom
CN3 "SM03B-SRSS" 3pins 59.334,76.403 r180 bottom
CN4 "SM03B-SRSS" 3pins 29.667,76.429 r180 bottom
CN5 "SM02B-SRSS" 2pins 14.224,83.464 r180 top
CN6 "SM03B-SRSS" 3pins 22.25,83.439 r180 top
CN7 "SM02B-SRSS" 2pins 9.246,83.439 r0 bottom
CN8 "SM02B-SRSS" 2pins 16.281,83.363 r0 bottom
CN9 "SM03B-SRSS" 3pins 58.191,-3.175 r180 bottom
CN10 "SM03B-SRSS" 3pins 49.809,-3.226 r180 bottom
CN11 "SM02B-SRSS" 2pins 35.027,-3.023 r180 bottom
CN12 "SM02B-SRSS" 2pins 41.91,-3.124 r180 bottom
CN13 "SM03B-SRSS" 3pins 27.915,-2.946 r180 bottom
CN14 "SM03B-SRSS" 3pins 19.456,-2.946 r180 bottom
CR1 "ABM3B-16.000MHZ" Crystal 47.346,34.671 r180 top
D1 "MMSD459A" GeneralDiode 60.554,5.563 r180 top
D2 "MMSD459A" GeneralDiode 79.375,5.969 r180 top
D3 "D Schottky" SMB 13.97,69.977 r270 top
D4 "D Schottky" SMB 60.071,45.542 r180 bottom
D5 "D Schottky" SMB 6.401,55.169 r0 top
D6 "D Schottky" SMB 4.547,67.767 r90 bottom
D7 "D Schottky" SMB 15.316,42.977 r270 top
D8 "D Schottky" SMB 3.988,42.926 r270 top
D9 "D Schottky" SMB 60.173,35.484 r180 bottom
D10 "D Schottky" SMB 15.088,22.809 r90 top
D11 "D Schottky" SMB 4.75,51.74 r90 bottom
D12 "D Schottky" SMB 22.657,9.017 r90 bottom
D13 "D Schottky" SMB 41.199,8.788 r90 bottom
D14 "D Schottky" SMB 62.611,65.862 r90 bottom
D15 "D Schottky" SMB 16.815,-0.889 r0 top
D16 "D Schottky" SMB 4.42,9.271 r270 bottom
D17 "D Schottky" SMB 53.442,23.901 r270 top
D18 "D Schottky" SMB 53.061,46.685 r90 top
FX1 "Fixure Hole" FixureHole 0.381,0.559 r0 top
FX2 "Fixure Hole" FixureHole 0.381,79.705 r0 top
FX3 "Fixure Hole" FixureHole 85.293,75.895 r0 top
FX4 "Fixure Hole" FixureHole 84.582,2.235 r0 top
H1 "ESQ12014GD" ? 85.852,7.188 r90 top (schematic designator B1)
L1 "4.7uH" IND_SPM6530 6.731,70.485 r180 top
L2 "4.7uF" IND_SPM6530 6.807,32.944 r0 top
L3 "4.7uF" IND_SPM6530 6.934,11.227 r180 top
L4 "4.7uH" IND_SPM6530 77.978,44.196 r90 top
L5 "4.7uH" IND_SPM6530 77.876,62.662 r90 top
M1 "IRF7329TRPBF" SO8_L 78.13,71.298 r0 top
M2 "IRF7329TRPBF" SO8_L 78.13,52.857 r0 top
M3 "IRF7329TRPBF" SO8_L 77.851,33.172 r0 top
M4 "IRF7329TRPBF" SO8_L 78.105,29.718 r270 bottom
M5 "IRF7329TRPBF" SO8_L 78.003,52.756 r270 bottom
ORG1 "SN74LV32ADR" D14-M 55.448,65.202 r0 bottom
ORG2 "SN74LV32ADR" D14-M 58.141,24.028 r180 bottom
R1 "330" RC0805N 69.012,11.024 r90 bottom
R2 "10K" RC0805N 67.005,10.947 r90 top
R3 "10K" RC0805N 69.672,17.196 r180 top
R4 "10K" RC0805N 75.209,17.145 r0 top
R5 "10K" RC0805N 65.202,18.796 r270 top
R6 "10K" RC0805N 79.705,16.993 r180 top
R7 "10K" RC0805N 80.112,10.846 r90 top
R8 "330" RC0805N 63.373,10.744 r90 bottom
R9 "4.7K" RC0805N 48.87,67.437 r180 bottom
R10 "4.7K" RC0805N 48.844,61.62 r0 bottom
R11 "100K" RC0805N 58.445,19.533 r180 top
R12 "R_sense" RC0805N 51.943,17.678 r180 bottom
R13 "100K" RC0805N 62.179,18.644 r90 top
R14 "RC0805FR" RC0805N 33.934,72.746 r0 bottom
R15 "RC0805FR" RC0805N 33.858,67.666 r180 bottom
R16 "1K" RC0805N 17.602,66.853 r270 top
R17 "R_sense" RC0805N 21.565,66.37 r180 top
R18 "1K" RC0805N 17.602,72.136 r270 top
R19 "1M" RC0805N 8.052,59.284 r270 top
R20 "RC0805FR" RC0805N 58.217,51.029 r270 bottom
R21 "51K" RC0805N 12.827,56.312 r90 top
R22 "10K" RC0805N 15.494,56.312 r90 top
R23 "4.7K" RC0805N 20.396,24.892 r270 bottom
R24 "4.7K" RC0805N 16.129,24.79 r90 bottom
R25 "RC0805FR" RC0805N 9.906,61.976 r180 bottom
R26 "RL0805FR-070R1L" RC0805N 14.122,61.214 r270 bottom
R27 "RC0805FR" RC0805N 13.97,66.878 r270 bottom
R28 "RC0805FR" RC0805N 25.298,21.92 r90 bottom
R29 "RC0805FR" RC0805N 28.346,21.844 r90 bottom
R30 "RC0805FR" RC0805N 7.823,39.726 r270 top
R31 "RL0805FR-070R1L" RC0805N 12.294,39.726 r270 top
R32 "RC0805FR" RC0805N 7.112,45.161 r270 top
R33 "10K" RC0805N 4.648,26.695 r180 top
R34 "RC0805FR" RC0805N 58.217,39.878 r270 bottom
R35 "260K" RC0805N 15.037,16.205 r180 top
R36 "47K" RC0805N 15.037,12.573 r180 top
R37 "4.7K" RC0805N 20.117,31.267 r90 bottom
R38 "4.7K" RC0805N 16.205,31.267 r270 bottom
R39 "RC0805FR" RC0805N 10.185,48.158 r180 bottom
R40 "RL0805FR-070R1L" RC0805N 14.275,47.549 r270 bottom
R41 "RC0805FR" RC0805N 14.173,52.883 r270 bottom
R42 "RC0805FR" RC0805N 18.644,19.609 r90 bottom
R43 "RC0805FR" RC0805N 14.91,19.583 r270 bottom
R44 "RC0805FR" RC0805N 34.62,6.147 r180 bottom
R45 "RL0805FR-070R1L" RC0805N 29.87,6.147 r0 bottom
R46 "RC0805FR" RC0805N 37.948,10.719 r270 bottom
R47 "10K" RC0805N 8.788,4.928 r180 top
R48 "RC0805FR" RC0805N 58.217,56.439 r90 bottom
R49 "260K" RC0805N 29.032,3.962 r270 top
R50 "47K" RC0805N 29.007,-1.346 r270 top
R51 "4.7K" RC0805N 15.824,36.525 r90 bottom
R52 "4.7K" RC0805N 20.015,36.525 r270 bottom
R53 "RC0805FR" RC0805N 14.376,6.375 r270 bottom
R54 "RL0805FR-070R1L" RC0805N 9.042,6.756 r0 bottom
R55 "RC0805FR" RC0805N 14.326,11.938 r270 bottom
R56 "1K" RC0805N 71.374,69.012 r180 top
R57 "1K" RC0805N 71.171,58.953 r180 bottom
R58 "1K" RC0805N 71.095,49.022 r180 bottom
R59 "10K" RC0805N 66.421,71.526 r90 bottom
R60 "10K" RC0805N 66.446,61.849 r90 bottom
R61 "10K" RC0805N 66.624,52.273 r90 bottom
R62 "10K" RC0805N 36.906,27.788 r90 top
R63 "1K" RC0805N 49.505,27.788 r270 top
R64 "1.6K" RC0805N 45.593,13.03 r90 top
R65 "150" RC0805N 41.25,17.196 r90 top
R66 "1K" RC0805N 56.82,24.409 r90 top
R67 "R_sense" RC0805N 62.027,30.175 r90 top
R68 "1K" RC0805N 56.769,30.226 r90 top
R69 "RL0805FR-070R1L" RC0805N 69.621,62.205 r180 top
R70 "RL0805FR-070R1L" RC0805N 69.545,72.06 r0 top
R71 "RL0805FR-070R1L" RC0805N 69.469,52.146 r0 top
R72 "10K" RC0805N 36.601,56.134 r90 top
R73 "1K" RC0805N 48.641,55.956 r90 top
R74 "3K" RC0805N 49.632,50.952 r90 top
R75 "150" RC0805N 49.682,46.101 r90 top
R76 "1K" RC0805N 56.566,44.78 r90 top
R77 "R_sense" RC0805N 56.566,51.181 r90 top
R78 "1K" RC0805N 61.925,51.003 r270 top
R79 "4.7K" RC0805N 42.824,62.586 r180 top
R80 "15K" RC0805N 34.188,61.747 r270 top
R81 "1K" RC0805N 71.501,29.286 r180 bottom
R82 "1K" RC0805N 71.374,19.761 r180 bottom
R83 "1K" RC0805N 71.374,38.811 r180 bottom
R84 "10K" RC0805N 66.675,32.258 r270 bottom
R85 "10K" RC0805N 66.675,23.597 r270 bottom
R86 "10K" RC0805N 66.573,41.783 r270 bottom
R87 "RL0805FR-070R1L" RC0805N 69.266,23.317 r180 top
R88 "RL0805FR-070R1L" RC0805N 69.901,32.817 r0 top
R89 "RL0805FR-070R1L" RC0805N 69.469,42.443 r180 top
R90 "10K" RC0805N 49.378,72.771 r90 bottom
R91 "10K" RC0805N 39.827,63.881 r0 bottom
R92 "10K" RC0805N 39.827,67.945 r0 bottom
R93 "RL0805FR-070R1L" RC0805N 77.902,43.891 r180 bottom
R94 "RL0805FR-070R1L" RC0805N 77.902,66.116 r180 bottom
R95 "51K" RC0805N 11.836,22.123 r90 bottom
R96 "51K" RC0805N 7.468,42.291 r90 bottom
R97 "51K" RC0805N 6.502,35.89 r90 bottom
U1 "ATmega2560-16AU" 100A_M 44.653,48.666 r180 bottom
Vref1 "ADR3450ARJZ-R2" RJ_6-M 46.101,6.858 r180 bottom
Vref2 "ADR3450ARJZ-R2" RJ_6-M 27.788,42.824 r0 bottom
W1 "Jumper" RAD-0.1 -1.118,5.766 r0 top
W2 "Jumper" RAD-0.1 -0.991,10.109 r0 top
W3 "Jumper" RAD-0.1 -0.991,32.537 r0 top
W4 "Jumper" RAD-0.1 -0.965,14.554 r0 top
W5 "Jumper" RAD-0.1 -0.965,23.012 r180 top
W6 "Jumper" RAD-0.1 -0.914,27.203 r180 top
W7 "Jumper" RAD-0.1 -0.965,54.661 r180 top
W8 "Jumper" RAD-0.1 -0.965,40.996 r180 top
W9 "Jumper" RAD-0.1 -0.991,36.754 r0 top
W10 "Jumper" RAD-0.1 -0.965,45.695 r180 top
W11 "Jumper" RAD-0.1 -0.991,50.267 r0 top
W12 "Jumper" RAD-0.1 -0.838,73.431 r180 top
W13 "Jumper" RAD-0.1 -1.041,18.796 r0 top
W14 "Jumper" RAD-0.1 -0.838,68.783 r0 top
W15 "Jumper" RAD-0.1 49.759,80.01 r270 top
W16 "Jumper" RAD-0.1 40.64,80.01 r90 top
W17 "Jumper" RAD-0.1 43.79,80.01 r90 top
W18 "Jumper" RAD-0.1 46.787,80.01 r90 top
W19 "Jumper" RAD-0.1 63.322,80.213 r90 top
W20 "Jumper" RAD-0.1 66.396,80.213 r270 top
W21 "Jumper" RAD-0.1 -0.914,58.953 r0 top
W22 "Jumper" RAD-0.1 -0.838,64.414 r0 top

## Footprints (in the part's own frame and the unit in brackets; to place one, negate y for a bottom-side part, rotate by r counter-clockwise, add the part's x,y. Pads: shape width x height; smd on the part's side, far side on the other; paste and mask are expansions set on the pad)
2pins [mm]
  rect 0.6x1.55 smd: 1(2,5.137) 2(3,5.137)
  rect 1.2x1.8 smd: 3(0.7,1.263) 4(4.3,1.263)
  silkscreen extent 0,0 5,7
3pins [mm]
  rect 0.6x1.55 smd: 1(2,5.137) 2(3,5.137) 3(4,5.137)
  rect 1.2x1.8 smd: 4(0.7,1.263) 5(5.3,1.263)
  silkscreen extent 0,0 6,7
100A_M [mm]
  oval 2.1x0.23 smd: 1(-7.6,6) 2(-7.6,5.5) 3(-7.6,5) 4(-7.6,4.5) 5(-7.6,4) 6(-7.6,3.5) 7(-7.6,3) 8(-7.6,2.5) 9(-7.6,2) 10(-7.6,1.5) 11(-7.6,1) 12(-7.6,0.5) 13(-7.6,0) 14(-7.6,-0.5) 15(-7.6,-1) 16(-7.6,-1.5) 17(-7.6,-2) 18(-7.6,-2.5) 19(-7.6,-3) 20(-7.6,-3.5) 21(-7.6,-4) 22(-7.6,-4.5) 23(-7.6,-5) 24(-7.6,-5.5) 25(-7.6,-6) 51(7.6,-6) 52(7.6,-5.5) 53(7.6,-5) 54(7.6,-4.5) 55(7.6,-4) 56(7.6,-3.5) 57(7.6,-3) 58(7.6,-2.5) 59(7.6,-2) 60(7.6,-1.5) 61(7.6,-1) 62(7.6,-0.5) 63(7.6,0) 64(7.6,0.5) 65(7.6,1) 66(7.6,1.5) 67(7.6,2) 68(7.6,2.5) 69(7.6,3) 70(7.6,3.5) 71(7.6,4) 72(7.6,4.5) 73(7.6,5) 74(7.6,5.5) 75(7.6,6)
  oval 0.23x2.1 smd: 26(-6,-7.6) 27(-5.5,-7.6) 28(-5,-7.6) 29(-4.5,-7.6) 30(-4,-7.6) 31(-3.5,-7.6) 32(-3,-7.6) 33(-2.5,-7.6) 34(-2,-7.6) 35(-1.5,-7.6) 36(-1,-7.6) 37(-0.5,-7.6) 38(0,-7.6) 39(0.5,-7.6) 40(1,-7.6) 41(1.5,-7.6) 42(2,-7.6) 43(2.5,-7.6) 44(3,-7.6) 45(3.5,-7.6) 46(4,-7.6) 47(4.5,-7.6) 48(5,-7.6) 49(5.5,-7.6) 50(6,-7.6) 76(6,7.6) 77(5.5,7.6) 78(5,7.6) 79(4.5,7.6) 80(4,7.6) 81(3.5,7.6) 82(3,7.6) 83(2.5,7.6) 84(2,7.6) 85(1.5,7.6) 86(1,7.6) 87(0.5,7.6) 88(0,7.6) 89(-0.5,7.6) 90(-1,7.6) 91(-1.5,7.6) 92(-2,7.6) 93(-2.5,7.6) 94(-3,7.6) 95(-3.5,7.6) 96(-4,7.6) 97(-4.5,7.6) 98(-5,7.6) 99(-5.5,7.6) 100(-6,7.6)
  silkscreen extent -7.73,-6.15 6.15,6.82, body extent -7,-7 7,7, height 1.2
0805 [mm]
  rect 1.3x1.5 smd: 1(-0.95,0) 2(0.95,0)
  silkscreen extent -1.9,-0.65 -1.9,0.65
Battery1 [mm]
  rect 7.34x6.35 smd: 1(3.67,31.06) 2(3.67,11.95)
  rect 3.7x3.7 hole 3.45: 3(15.56,4)
  rect 3.3x3.3 hole 3.17: 4(15.56,21.505)
BATTERY2 [mm]
  rect 7.34x6.35 smd: 3(82.65,31.06) 4(82.55,11.938)
  rect 2.5x2.5 hole 2.39: 5(78.98,4)
  rect 3.3x3.3 hole 3.17: 6(70.76,21.505)
  rect 3.7x3.7 hole 3.45: 7(70.76,39.01)
Crystal [mm]
  rect 1.8x1.2 smd far side: 1(0,0) 2(4,0) 3(4,2.4) 4(0,2.4)
  silkscreen extent -1.98,-1.27 5.21,3.3
D14-M [mil]
  rect 90x24 smd: 1(-99,150) 2(-99,100) 3(-99,50) 4(-99,0) 5(-99,-50) 6(-99,-100) 7(-99,-150) 8(99,-150) 9(99,-100) 10(99,-50) 11(99,0) 12(99,50) 13(99,100) 14(99,150)
  silkscreen extent -83,-177 164,177, body extent 0,0 10,10, height 10
DBV005 [mm]
  rect 0.55x1.45 smd: 1(-0.95,-1.075) 2(0,-1.075) 3(0.95,-1.075) 4(0.95,1.075) 5(-0.95,1.075)
  silkscreen extent -1.57,-1.35 1.55,0.9
FixureHole [mm]
  round 4.1 hole 3.5: 1(0,0)
  oval 1.4x1 hole 0.4: 2(-2.286,1.651) 4(-2.159,-1.651) 6(2.159,-1.651) 8(2.286,1.651)
  oval 1.3x1 hole 0.4: 3(-2.794,0) 7(2.794,0)
  oval 1.8x1 hole 0.4: 5(0,-2.54) 9(0,2.54)
  silkscreen extent -3.5,-3.5 3.5,3.5
"G6SK-2G DC3" [mm] "RELAY TELECOM DPDT 2A 3V"
  rect 1x2.2 smd: 1(0.508,1.143) 2(0.508,7.112) 3(5.588,1.143) 4(8.128,1.143) 5(10.668,1.143) 6(13.208,1.143) 7(13.208,7.112) 8(10.668,7.112) 9(8.128,7.112) 10(5.588,7.112)
  silkscreen extent -0.63,0.38 14.22,7.75
GeneralDiode [mm]
  rect 1.2x0.9 all layers, no hole: 1(0,0) 2(0,3.4)
  silkscreen extent -0.8,0.45 0.8,2.95
IND_SPM6530 [mm]
  rect 1.85x3.4 smd: 1(-2.775,0) 2(2.775,0)
  silkscreen extent -3.37,-3.38 3.37,3.38, body extent 0,0 0.25,0.25, height 0.25
LT-S5-5-TSOT-23_N [mm]
  rect 1.3x0.55 smd: 1(-1.2,0.95) 2(-1.2,0) 3(-1.2,-0.95) 4(1.2,-0.95) 5(1.2,0.95)
  silkscreen extent -1.32,-1.45 0.15,1.9, body extent -0.87,-1.45 0.87,1.45, height 1
LT-S8-8_N [mm]
  oval 2.2x0.6 smd: 1(-2.4,1.905) 2(-2.4,0.635) 3(-2.4,-0.635) 4(-2.4,-1.905) 5(2.4,-1.905) 6(2.4,-0.635) 7(2.4,0.635) 8(2.4,1.905)
  silkscreen extent -2.53,-2.5 0.9,2.88, body extent -2,-2.5 2,2.5, height 1.76
LT-TS8-8-TSOT-23_V [mm]
  rect 1.22x0.4 smd: 1(-1.31,0.975) 2(-1.31,0.325) 3(-1.31,-0.325) 4(-1.31,-0.975) 5(1.31,-0.975) 6(1.31,-0.325) 7(1.31,0.325) 8(1.31,0.975)
  silkscreen extent -1.43,-1.45 0.3,1.85, body extent -0.87,-1.45 0.88,1.45, height 1
RAD-0.1 [mm] "Radial Cap, Thru-Hole; 2 Leads; 0.1 in Pin Spacing"
  rect 1.4x1.4 hole 1.1: 1(-1.27,0) 2(1.27,0)
  silkscreen extent -2.54,-1.14 2.54,1.14
RC0805N [mil]
  rect 40x47 smd: 1(-33.5,0) 2(33.5,0)
  body extent 0,0 10,10, height 10
RJ_6-M [mil]
  rect 70x24 smd: 1(-46,37.4) 2(-46,0) 3(-46,-37.4) 4(46,-37.4) 5(46,0) 6(46,37.4)
  silkscreen extent -39,-64 38,64, body extent 0,0 10,10, height 10
SMB [mm]
  rect 2.3x2.3 smd: 1(-2.25,0) 2(2.25,0)
  silkscreen extent -3.8,-1.55 4.1,1.55
SO8_L [mm]
  oval 1.9x0.6 smd: 1(-2.35,1.905) 2(-2.35,0.635) 3(-2.35,-0.635) 4(-2.35,-1.905) 5(2.35,-1.905) 6(2.35,-0.635) 7(2.35,0.635) 8(2.35,1.905)
  silkscreen extent -2.47,-2.5 1,2.88, body extent -2,-2.5 2,2.5, height 1.75
SOIC16_L [mm]
  oval 1.9x0.6 smd: 1(-2.35,4.445) 2(-2.35,3.175) 3(-2.35,1.905) 4(-2.35,0.635) 5(-2.35,-0.635) 6(-2.35,-1.905) 7(-2.35,-3.175) 8(-2.35,-4.445) 9(2.35,-4.445) 10(2.35,-3.175) 11(2.35,-1.905) 12(2.35,-0.635) 13(2.35,0.635) 14(2.35,1.905) 15(2.35,3.175) 16(2.35,4.445)
  silkscreen extent -2.47,-5 1,5.42, body extent -2,-5 2,5, height 1.91
SOT-23A_L [mm]
  rect 0.85x0.6 smd: 1(-1.075,0.95) 2(-1.075,-0.95) 3(1.075,0)
  silkscreen extent -1.2,-1.5 0.7,1.92, body extent -0.7,-1.5 0.7,1.5, height 1.09
TAJB [mil]
  rect 54x95 smd: 1(-49,0) 2(49,0)
  silkscreen extent -126,-64 78,64, body extent 0,0 10,10, height 10
TJ7A-M [mil]
  rect 33x115 smd: 1(-150,-330.5) 2(-100,-330.5) 3(-50,-330.5) 4(0,-330.5) 5(50,-330.5) 6(100,-330.5) 7(150,-330.5)
  rect 414x438 smd: 8(0,2)
  silkscreen extent -165,-259 164,-230, body extent 0,0 10,10, height 10
? [mm]
  rect 1.65x1.65 / inner round 1.65 / far side rect 1.65x1.65 hole 1.1: 1(0,0)
  round 1.65 hole 1.1: 2(0,2.54) 3(2.54,0) 4(2.54,2.54) 5(5.08,0) 6(5.08,2.54) 7(7.62,0) 8(7.62,2.54) 9(10.16,0) 10(10.16,2.54) 11(12.7,0) 12(12.7,2.54) 13(15.24,0) 14(15.24,2.54) 15(17.78,0) 16(17.78,2.54) 17(20.32,0) 18(20.32,2.54) 19(22.86,0) 20(22.86,2.54) 21(25.4,0) 22(25.4,2.54) 23(27.94,0) 24(27.94,2.54) 25(30.48,0) 26(30.48,2.54) 27(33.02,0) 28(33.02,2.54) 29(35.56,0) 30(35.56,2.54) 30(35.56,2.54) 31(38.1,0) 32(38.1,2.54) 32(38.1,2.54) 33(40.64,0) 34(40.64,2.54) 34(40.64,2.54) 35(43.18,0) 36(43.18,2.54) 36(43.18,2.54) 37(45.72,0) 38(45.72,2.54) 38(45.72,2.54) 39(48.26,0) 40(48.26,2.54) 40(48.26,2.54) 41(50.8,0) 42(50.8,2.54) 43(53.34,0) 44(53.34,2.54) 45(55.88,0) 46(55.88,2.54) 47(58.42,0) 48(58.42,2.54) 49(60.96,0) 50(60.96,2.54) 51(63.5,0) 52(63.5,2.54)
  silkscreen extent -1.17,-1.2 64.77,3.75

## Part data
*Boost1 *Boost2 *Boost3: library part LMR62421XMFE/NOPB, "Switching Voltage Regulators SIMPLE SWITCHER 24V out,2.1A SU Vltg Reg"
*Buck1 *Buck2: "step down converter"
*CS1: "Single Channel, High Side Current Sense, 60 V Supply Operation, Precision Operational Amplifier, 0.115 MHz Typical GBW, 2.5 to 60 V, 8-Pin SOIC (S8-8), Commercial, Pb-Free, Reel"
*CS2 *CS3 *CS4 *CS5 *CS6 *CS7: library part LT6106HS5#TRMPBF, "Single Channel, Low Cost, High Side Current Sense Operational Amplifier, 0.2 MHz Typical GBW, 5-Pin SOT-23 (S5-5), High Temperature / Automotive, Pb-Free, Mini Reel"
*CS8 *CS9: "Single Channel, Low Cost, High Side Current Sense Operational Amplifier, 0.2 MHz Typical GBW, 5-Pin SOT-23 (S5-5), High Temperature / Automotive, Pb-Free, Mini Reel"
*KillSW1 *SepSW1 M1 M2 M3 M4 M5: "P-MOSFET, DUAL PCh -12V 9.2A"
*OverCP1 *OverCP2 *OverCP3 *OverCP4 *OverCP5 *OverCP6: "Overvoltage / Overcurrent Protection Controller, 2.5 to 80 V Vin, 8-pin SOT23 (TS8-8), -40 to 85 degC, Pb-Free, Mini Tape and Reel"
*OverCP7 *OverCP8: library part LTC4361ITS8-1#TRMPBF, "Overvoltage / Overcurrent Protection Controller, 2.5 to 80 V Vin, 8-pin SOT23 (TS8-8), -40 to 85 degC, Pb-Free, Mini Tape and Reel"
*Relay: library part "Omron G6SK-2G", "RELAY TELECOM DPDT 2A 3V"
ADC1 ADC2: "Analog  to Digital Converter, 10BIT 8 Channel"
BJT1 BJT2: library part 2STF1360, "BJT, NPN"
BJT3 BJT4 BJT5 BJT6 BJT7 BJT8: library part 2STF1360, "BJT"
C1: "Ceramic Capacitor 47uF 0603"
C2 C35: library part GRM155R71H103KA8, "Ceramic Capacitor 0402"
C3 C7 C9 C13 C15 C19: "Ceramic Capacitor 0402"
C4 C8 C10 C14 C16 C20: library part GRM155R71H103KA8, "Ceramic Capacitor"
C5 C6 C11 C12 C17 C18: library part GRM188R71H472KA0, "Ceramic Capacitor 47uF 0603"
C21 C28: library part TAJB226M010RNJ, "Tantalum Capacitor, 22uF"
C22 C23 C29 C30: library part C0805C106K8PACTU, "Ceramic Capacitor 10uF"
C24: library part TAJB226M010RNJ, "Tantalum Capacitor. 100uF"
C25 C31: library part TAJB226M010RNJ, "Tantalum Capacitor, 100uF"
C26 C33: library part GRM155R71H103KA8, "Ceramic Capacitor 10nF"
C27 C34: library part GRM188R61C105KA9, "Ceramic Capacitor 1uF"
C32: library part TAJB226M010RNJ, "Tantalum Capacitor,100uF"
C36: library part GRM155R71H103KA8, "Ceramic Capacitor 1uF"
C37 C38: library part GRM155R71H103KA8, "Ceramic Capacitor 22uF"
CN1 CN2 CN5 CN7 CN8 CN11 CN12: library part 2Pin_Connector, "CONN HEADER SH 2POS SIDE 1MM TIN"
CN3 CN4 CN6 CN9 CN10 CN13 CN14: library part 3PIN_Connector, "CONN HEADER SH 3POS SIDE 1MM TIN"
CR1: library part ABM3B-16.000MHZ-10-1-U-T, "CRYSTAL 16.0000MHZ 10PF SMD"
D1 D2: "Diode General Purpose, SOD-123"
D3 D4 D5 D6 D7 D8 D9 D10 D11 D12 D13 D14 D15 D16 D18: "Schottky Diode, 1A"
D17: "Schottky Diode, 3A"
FX1 FX2 FX3 FX4: "Header, 9-Pin"
H1: "2x20 way standard long pin PCB socket Samtec ESQ Series 2.54mm 40 Way 2 Row Straight PCB Socket Through Hole Board to Board"
L1 L2 L3 L4 L5: library part SPM6530T-4R7M, "Inductor, 4.7uH"
ORG1 ORG2: "OR GATE, 4 Channels"
R1 R2 R3 R4 R5 R6 R7 R8 R9 R10 R11 R13 R16 R18 R19 R21 R22 R23 R24 R33 R35 R36 R37 R38 R47 R49 R50 R51 R52 R66 R68 R76 R78 R95 R96 R97: library part RC0805FR, "Thick Film Resistors 0805"
R12 R17 R67 R77: library part RL0805FR-070R1L, "Sense Resistor 100m ohm 0805"
R14 R15 R20 R25 R27 R28 R29 R30 R32 R34 R39 R41 R42 R43 R44 R46 R48 R53 R55: "Thick Film Resistors 0805"
R26 R31 R40 R45 R54 R69 R70 R71 R87 R88 R89 R93 R94: "Sense Resistor 100m ohm 0805"
R56 R57 R58 R63 R73 R81 R82 R83: library part RC0805FR, "Thick Film Resistors, 1k ohm"
R59 R60 R61 R72 R84 R85 R86: library part RC0805FR, "Thick Film Resistors, 10k ohm"
R62 R90 R92: library part RC0805FR, "Thick Film Resistors 10k ohm"
R64: library part RC0805FR, "Thick Film Resistors, 1.6kohm"
R65 R75: library part RC0805FR, "Thick Film Resistors, 150 ohm"
R74: library part RC0805FR, "Thick Film Resistors, 3k ohm"
R79: library part RC0805FR, "Resistors 0805, 4.7k ohm"
R80: library part RC0805FR, "Resistors 0805, 15k ohm"
R91: library part RC0805FR, "Thick Film Resistors 10kohm"
U1: "8-bit AVR Microcontroller, 4.5-5.5V, 256KB Flash, 4KB EEPROM, 8KB SRAM, 86 GPIO pins, 100-pin TQFP, Industrial Grade (-40°C to 85°C), Pb-Free"
Vref1 Vref2: library part ADR3412ARJZ-R2, "Voltage Reference"
W1 W2 W3 W4 W5 W6 W7 W8 W9 W10 W11 W12 W13 W14 W15 W16 W17 W18 W19 W20 W21 W22: "Jumper Wire"

## Via types
v1: diameter 0.61, hole 0.305, Top Layer to Bottom Layer, 314 vias
v2: diameter 0.61, hole 0.3, Top Layer to Bottom Layer, 1 vias

## Nets (pads, with @x,y where several pads share a name; then routed paths per layer and width w, separated by ;. In a path a pad name is that pad's centre, name@x,y a point inside that pad or via, vN(x,y) a via of type N, cw(c..) or ccw(c..) an arc to the next point about the centre after c; other vN are vias at no path point)
CONV_X_OUT: C6.2 C7.2 C8.2 D5.2 R21.1 R23.1 R25.2 R26.2 | length 127.5
  Top Layer w0.3: v1(2.507,33.761) 2.507,50.089 2.812,50.394 C7.2@3.416,50.394 ; v1(7.157,53.675) D5.2@8.651,55.169 ; C6.2@11.036,50.394 12.408,50.394 ; R21.1@12.827,55.461 12.827,51.313 13.077,51.063 12.408,50.394 ; C8.2@15.494,49.974 14.165,49.974 12.827,49.974 12.408,50.394
  Top Layer w1: D5.2@8.651,55.169 11.036,52.783 C6.2@11.036,50.394 ; 13.077,51.063 14.165,49.974
  Routing 1 w0.3: v1(2.507,53.675) v1(7.157,53.675)
  Bottom Layer w0.3: v1(2.507,53.675) 2.507,60.3 ; R25.2@9.055,61.976 4.183,61.976 2.507,60.3 ; R23.1@20.396,25.743 19.688,25.743 18.052,27.379 17.778,27.379 17.633,27.233 15.613,27.233 15.029,24.693 8.298,24.058 7.892,32.948 7.079,33.761 v1(2.507,33.761) -1.684,33.761 -3.462,35.539 -3.462,59.771 2.507,60.3
  Bottom Layer w0.5: R25.2@9.055,61.976 9.293,61.976 10.906,60.363 R26.2@14.122,60.363
CONV_Y_OUT: C12.2 C13.2 C14.2 D10.2 R35.1 R37.1 R39.2 R40.2 | length 64.4
  Top Layer w0.3: C14.2@9.652,25.006 v1(9.652,27.871) ; v1(12.464,25.059) D10.2@15.088,25.059
  Top Layer w0.7: C13.2@15.697,30.848 17.577,30.848 v1(18.009,30.416)
  Top Layer w1: C12.2@12.624,30.848 C13.2@15.697,30.848 15.697,28.249 ; R35.1@15.888,16.205 16.472,16.205 17.738,17.471 17.738,22.409 D10.2@15.088,25.059 ; D10.2@15.088,25.059 16.604,26.575 16.604,26.733 15.697,27.64 15.697,28.249 ; D10.2@15.088,25.059 15.088,27.64 15.697,28.249
  Bottom Layer w0.3: R39.2@9.335,48.158 9.335,28.188 v1(9.652,27.871) v1(12.464,25.059)
  Bottom Layer w0.5: R39.2@9.335,48.158 9.573,48.158 11.033,46.698 R40.2@14.275,46.698
  Bottom Layer w0.7: v1(18.009,30.416) R37.1@20.117,30.416
CONV_Z_OUT: C18.2 C19.2 C20.2 D15.2 R49.1 R51.1 R53.2 R54.2 | length 84.3
  Top Layer w0.3: C18.2@17.488,9.322 17.721,9.322 18.758,8.285 21.303,8.285 24.549,8.285 ; C19.2@24.27,9.271 24.27,8.564 24.549,8.285 ; R49.1@29.032,4.813 29.032,7.871 28.618,8.285 24.549,8.285
  Top Layer w0.5: v1(14.376,3.799) D15.2@19.065,-0.889
  Top Layer w0.7: C20.2@12.802,9.334 17.488,9.334 C18.2@17.488,9.322 ; D15.2@19.065,-0.889 19.065,0.716 ; v1(28.008,4.813) R49.1@29.032,4.813
  Top Layer w1: 21.303,8.285 22.289,9.271 C19.2@24.27,9.271
  Routing 1 w0.7: 19.065,0.716 23.911,0.716 v1(28.008,4.813)
  Routing 2 w0.5: v1(15.553,5.524) 17.137,7.109 v1(17.137,35.674)
  Bottom Layer w0.5: v1(14.376,3.799) R53.2@14.376,5.524 v1(15.553,5.524) ; R51.1@15.824,35.674 v1(17.137,35.674)
  Bottom Layer w1: R54.2@9.893,6.756 11.498,6.756 12.73,5.524 R53.2@14.376,5.524
DRAIN6: *OverCP4.6 M3.5 M3.6 R87.1 | length 22.5
  Top Layer w0.3: R87.1@70.117,23.317 70.117,27.259 70.397,27.539 *OverCP4.6@71.135,27.539
  Top Layer w0.7: R87.1@70.117,23.317 73.394,23.317 74.084,24.008 74.084,27.919 78.702,32.537 M3.6@80.201,32.537
  Top Layer w1: M3.5@80.201,31.267 M3.6@80.201,32.537
DRAIN_2: *OverCP1.6 M1.5 M1.6 R69.1 | length 25.8
  Top Layer w0.3: R69.1@70.472,62.205 75.252,62.616 75.252,66.163 75.76,66.671 ; *OverCP1.6@71.338,66.426 73.03,66.426 73.275,66.671 75.76,66.671 ; M1.5@80.48,69.393 79.418,69.393 76.696,66.671 75.76,66.671
  Top Layer w0.7: R69.1@70.472,62.205 70.376,62.205 70.376,66.121 70.68,66.426 *OverCP1.6@71.338,66.426
  Top Layer w1: M1.5@80.48,69.393 M1.6@80.48,70.663
EPS_3.3V_VCC: *OverCP7.2 H1.10 M4.1 M4.3 | length 31.9
  Bottom Layer w0.3: M4.1@76.2,32.068 76.2,33.54 77.564,34.904 77.564,37.622 77.436,37.75 *OverCP7.2@76.795,37.75 ; M4.3@78.74,32.068 78.842,32.068 78.791,32.017 77.467,30.692 75.282,30.692 75.176,30.586 75.176,25.484 H1.10@83.312,17.348
  Bottom Layer w1: M4.1@76.2,31.959 77.467,30.692 M4.1@76.2,31.959 ; M4.1@76.2,31.959 76.145,32.013 76.091,32.068 M4.1@76.2,32.068 M4.1@76.2,31.959
EPS_5V_VCC: *CS2.5 *CS3.5 *CS4.5 *CS5.5 *CS6.5 *CS7.5 *CS8.5 *CS9.5 *OverCP8.2 *Relay.1 *Relay.6 ADC1.16 ADC2.16 CN3.1 CN4.1 CN6.1 CN9.1 CN10.1 CN13.1 CN14.1 D1.2 D2.2 H1.8 M5.1 M5.3 ORG1.14 ORG2.14 R5.1 R59.1 R60.1 R61.1 R84.1 R85.1 R86.1 R90.1 R91.2 R92.2 U1.10 U1.31 U1.61 U1.80 U1.100 Vref1.6 Vref2.6 W20.1 | length 297.2
  Top Layer w0.3: 11.294,46.111 *CS4.5@12.376,46.111 13.175,46.111 14.013,45.273 14.013,43.515 14.623,42.905 16.426,42.905 17.01,42.321 17.01,37.444 v1(20.896,33.558) ; CN6.1@20.25,78.302 20.25,77.181 23.233,74.198 23.233,72.908 *CS2.5@23.335,72.908 ; 23.335,76.84 *CS2.5@23.335,72.908 ; v1(31.336,73.563) 30.681,72.908 *CS2.5@23.908,72.908 *CS2.5@23.335,72.908 ; 52.646,38.435 55.67,38.435 60.852,43.616 62.349,43.616 62.757,44.024 62.757,45.602 *CS9.5@62.466,45.893 ; v1(55.872,36.428) 57.066,36.428 57.625,36.987 57.625,40.238 60.673,43.286 62.349,43.286 62.781,43.718 62.781,45.852 *CS9.5@62.466,45.893 ; 56.191,1.962 57.256,3.027 v1(63.543,3.027) ; D1.2@60.554,2.163 63.551,2.163 *Relay.1@63.551,0.889 ; v1(65.651,24.439) 63.949,22.738 ; 66.231,19.647 R5.1@65.202,19.647 65.202,20.35 ; v1(72.103,7.955) 72.56,8.412 74.135,8.412 74.541,8.006 74.541,4.026 76.251,2.316 76.251,2.062 ; 75.946,-1.573 75.946,-1.071 76.251,-0.767 *Relay.6@76.251,0.889 76.251,2.062 ; D2.2@79.375,2.569 76.758,2.569 76.251,2.062 ; 60.952,24.456 60.952,20.756 61.359,20.35 65.202,20.35 ; 60.952,24.456 60.952,25.227 61.085,25.359 61.186,25.359 ; 60.952,24.456 61.054,24.558 ; 61.054,24.558 61.054,23.195 61.511,22.738 63.949,22.738 ; 61.054,24.558 61.054,25.227 61.186,25.359 ; 61.054,24.558 *CS8.5@61.855,25.359 61.186,25.359 ; *CS9.5@62.466,45.893 *CS9.5@61.957,45.959 62.4,45.959 *CS9.5@62.466,45.893 ; v1(63.543,3.027) v1(63.551,3.027) 63.551,2.164 63.543,2.171 v1(63.543,3.027) ; 63.949,22.738 62.908,21.696 62.908,21.569 63.391,21.087 64.788,21.087 65.202,20.672 65.202,20.35 ; 65.202,20.35 67.404,20.35 ; 67.404,20.35 67.861,19.893 67.861,19.944 67.455,20.35 67.404,20.35
  Bottom Layer w0.3: v1(5.428,73.614) 6.342,73.614 6.774,73.182 6.774,68.991 6.266,68.483 3.643,68.483 0.424,65.264 -0.44,64.655 -0.44,63.835 -0.033,63.428 2.837,63.428 3.243,63.835 3.243,66.273 3.787,66.817 7.033,66.817 7.942,67.727 *CS3.5@8.325,67.727 ; *CS7.5@8.198,13.574 v1(9.28,13.574) ; CN14.1@17.456,2.191 17.456,-1.113 17.777,-1.434 v1(17.777,-3.908) ; ADC2.16@20.015,57.619 20.015,58.686 20.49,59.161 v1(20.896,59.161) ; v1(20.896,7.472) 20.896,5.339 ; CN13.1@25.915,2.191 CN13.1@25.915,2.849 ; *CS6.5@27.426,11.542 v1(28.508,11.542) ; v1(27.667,80.359) CN4.1@27.667,81.566 ; ADC1.16@28.156,27.305 33.597,27.305 33.957,27.665 v1(38.393,27.665) ; Vref2.6@28.956,41.874 v1(30.277,41.874) ; U1.61@37.053,47.666 38.216,47.666 38.535,47.985 v1(38.535,48.479) ; v1(37.991,70.82) 40.196,70.82 40.678,70.337 R92.2@40.678,67.945 ; v1(38.524,47.68) 38.778,47.68 40.653,49.556 U1.80@40.653,56.266 ; v1(42.682,8.179) 43.15,8.179 43.521,7.808 Vref1.6@44.933,7.808 ; CN10.1@47.809,1.912 47.809,0.589 48.13,0.268 v1(48.13,-0.225) ; R90.1@49.378,71.92 v1(50.406,71.92) ; U1.100@50.653,56.266 50.653,56.697 v1(53.485,56.697) 53.485,60.177 54.221,60.914 58.793,60.914 ORG1.14@58.793,61.392 ; v1(53.121,27.991) 53.699,27.991 53.851,27.838 ORG2.14@55.626,27.838 ; CN9.1@56.191,1.962 57.256,3.027 v1(63.543,3.027) v1(63.551,3.027) ; v1(56.334,71.479) 56.334,75.595 57.334,76.595 CN3.1@57.334,81.541 ; ORG1.14@57.963,61.392 ORG1.14@58.793,61.392 ; v1(65.646,23.635) 65.646,24.211 65.883,24.447 R85.1@66.675,24.447 ; R59.1@66.421,70.675 v1(67.45,70.675) ; R60.1@66.446,60.998 65.6,61.201 65.6,64.546 64.49,65.657 57.272,65.657 56.67,65.054 56.67,63.454 57,63.124 58.768,63.124 59.276,62.616 59.17,61.392 ORG1.14@58.793,61.392 ; R86.1@66.573,42.634 v1(67.602,42.634) ; R61.1@66.624,51.422 v1(67.653,51.422) ; R84.1@66.675,33.109 v1(67.704,33.109) ; *OverCP8.2@76.693,61.118 77.335,61.118 77.462,60.99 77.462,57.579 ; M5.3@78.638,55.106 78.199,55.106 78.021,55.284 78.021,55.758 77.462,56.316 77.462,56.85 ; 20.896,5.339 21.303,4.932 23.832,4.932 24.314,4.45 ; 20.896,5.339 20.896,4.856 21.303,4.45 24.314,4.45 ; 24.314,4.45 CN13.1@25.915,2.849 ; 24.314,4.45 24.873,4.45 25.915,3.408 CN13.1@25.915,2.849 ; R92.2@40.678,67.945 R91.2@40.678,63.881 40.683,63.881 40.683,67.945 R92.2@40.678,67.945 ; 77.462,56.85 76.497,55.885 76.497,55.106 M5.1@76.098,55.106 76.098,56.215 77.462,57.579 ; 77.462,56.85 77.462,57.579